# Altium PCB DaughterBoards.PcbDoc (part 1 of 4)
Units mil, origin at the board's own origin, x right, y up, seen from the top; angles counter-clockwise.
Board outline 8080.87 x 6506.06 mil, 4 copper layers (Top Layer, Top, Mid-Layer 1, GND, Mid-Layer 2, VCC, Bottom Layer, Bottom), stack 18.2 mil thick; 508 components, 296 nets, 1635 pads, 376 vias.
Unrouted connection lines stored in the file: 28.
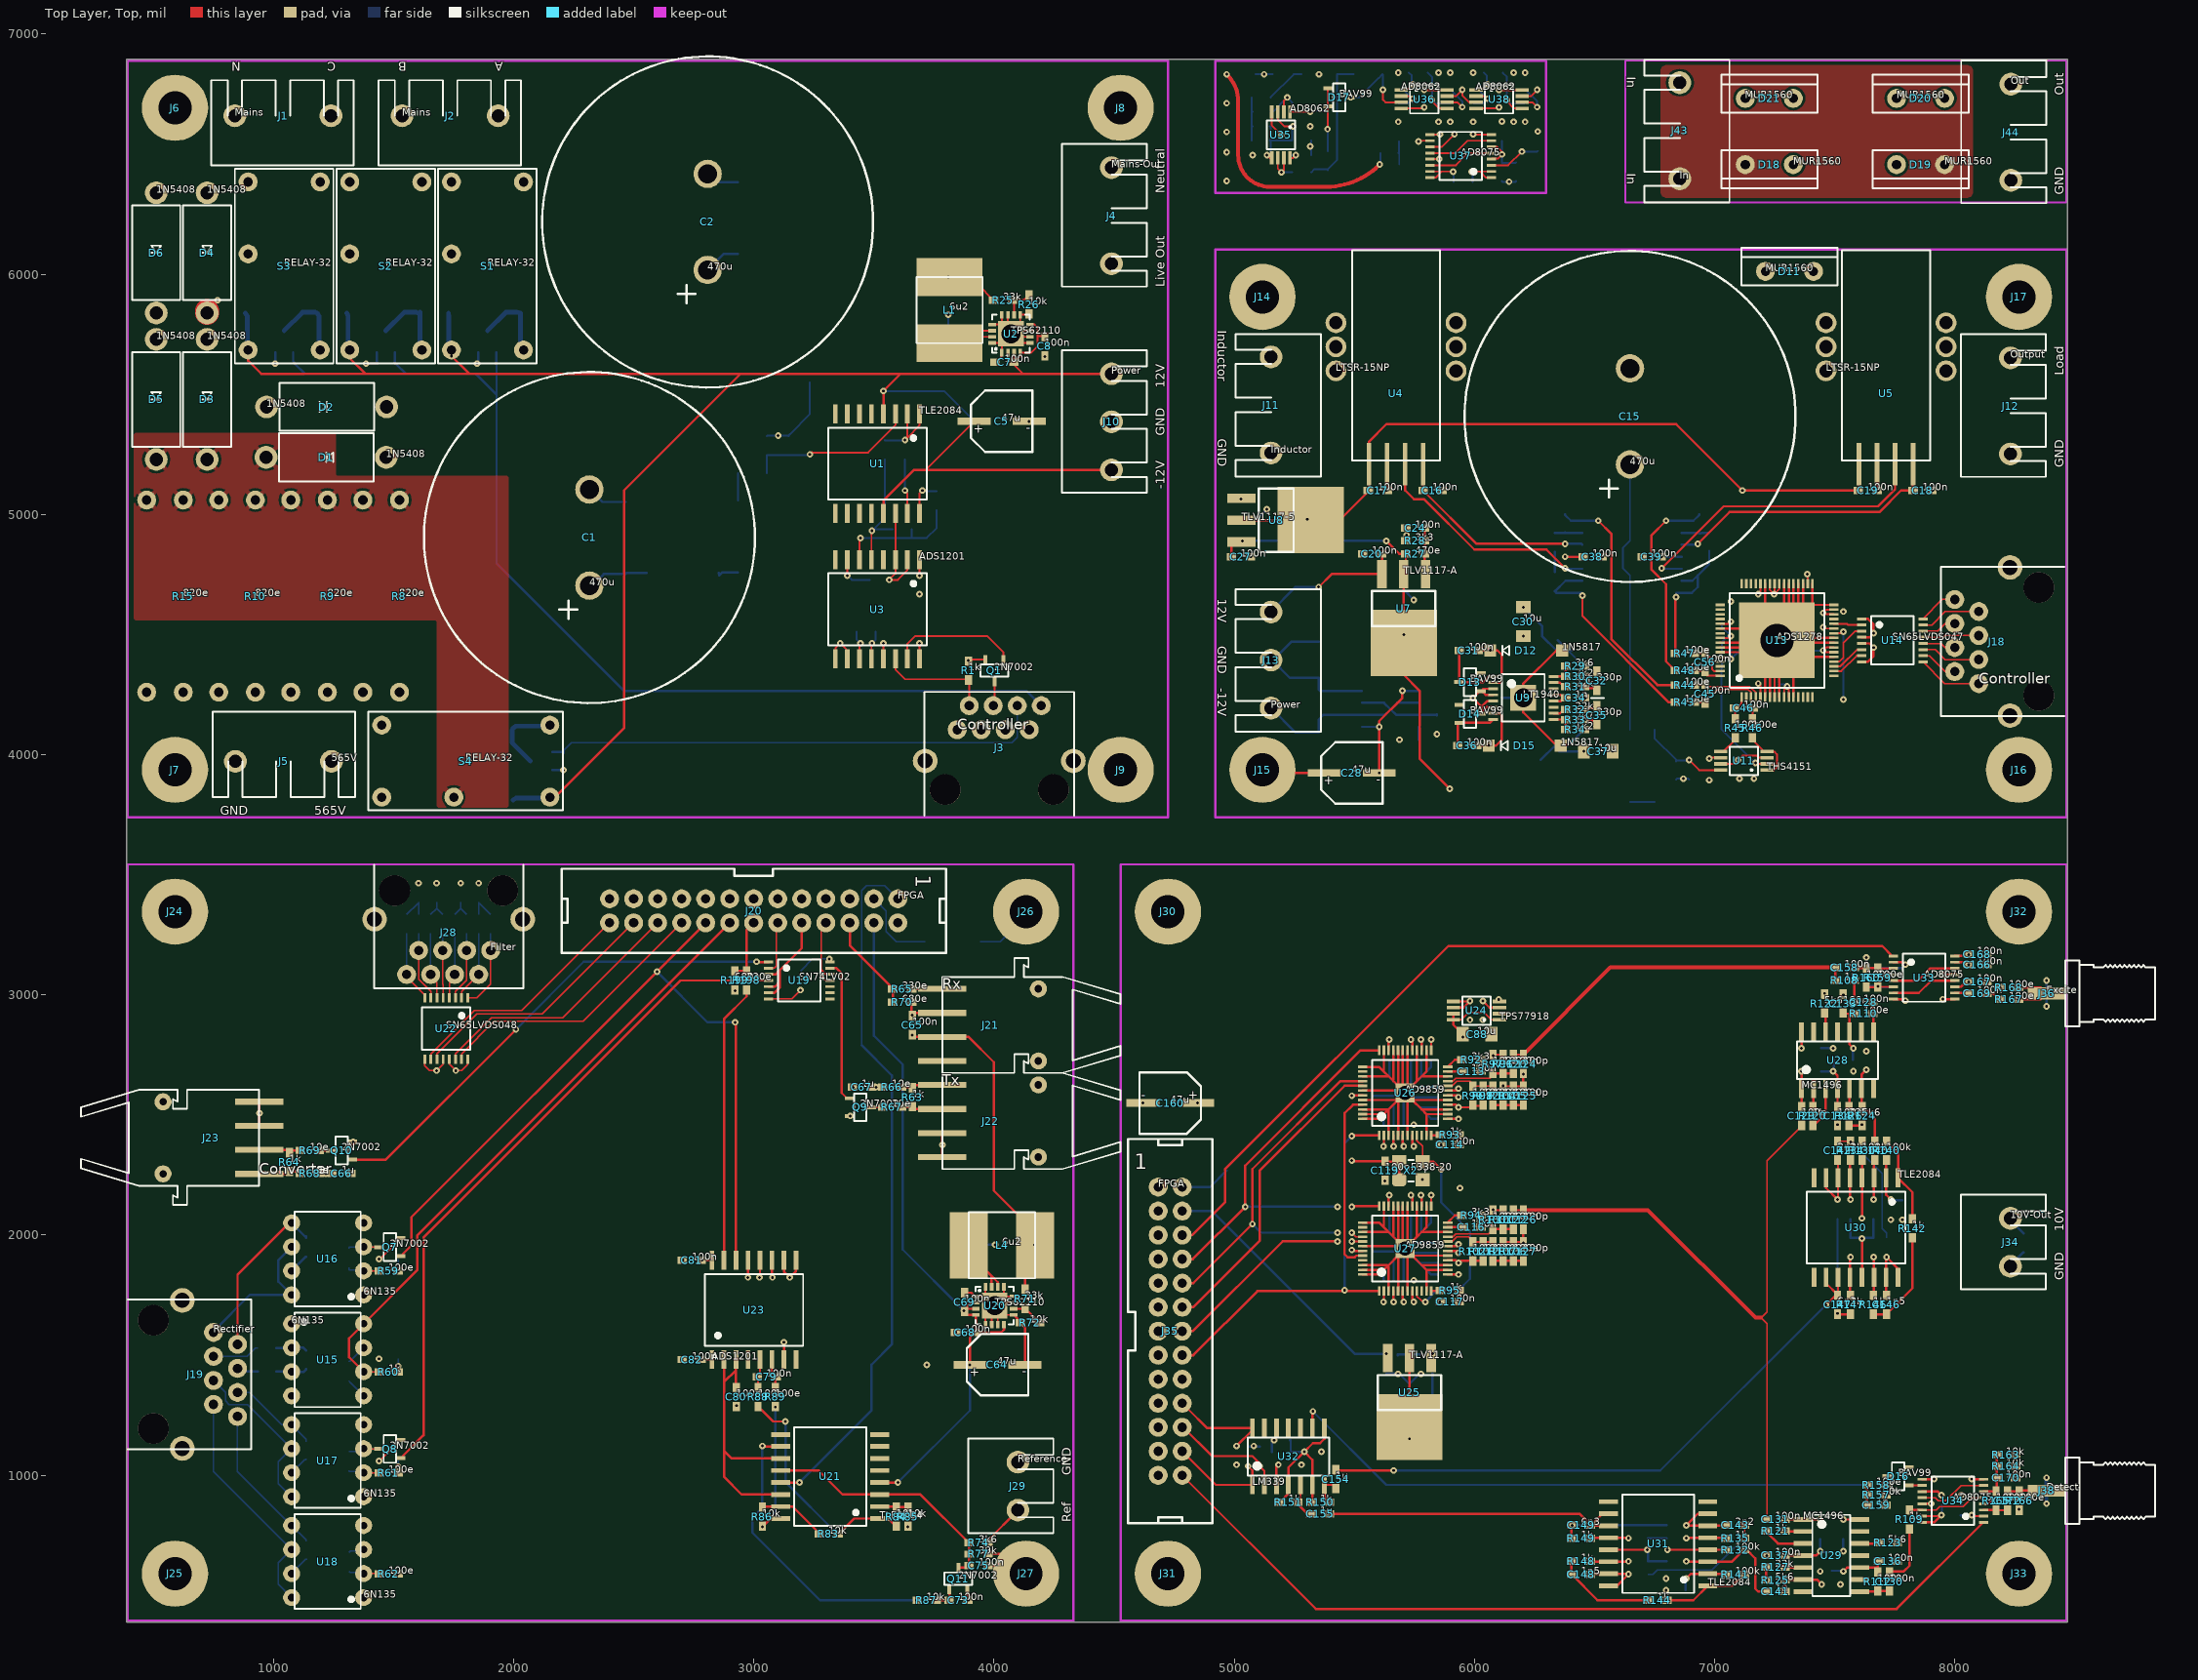
[diagram p0: Top Layer, Top view]
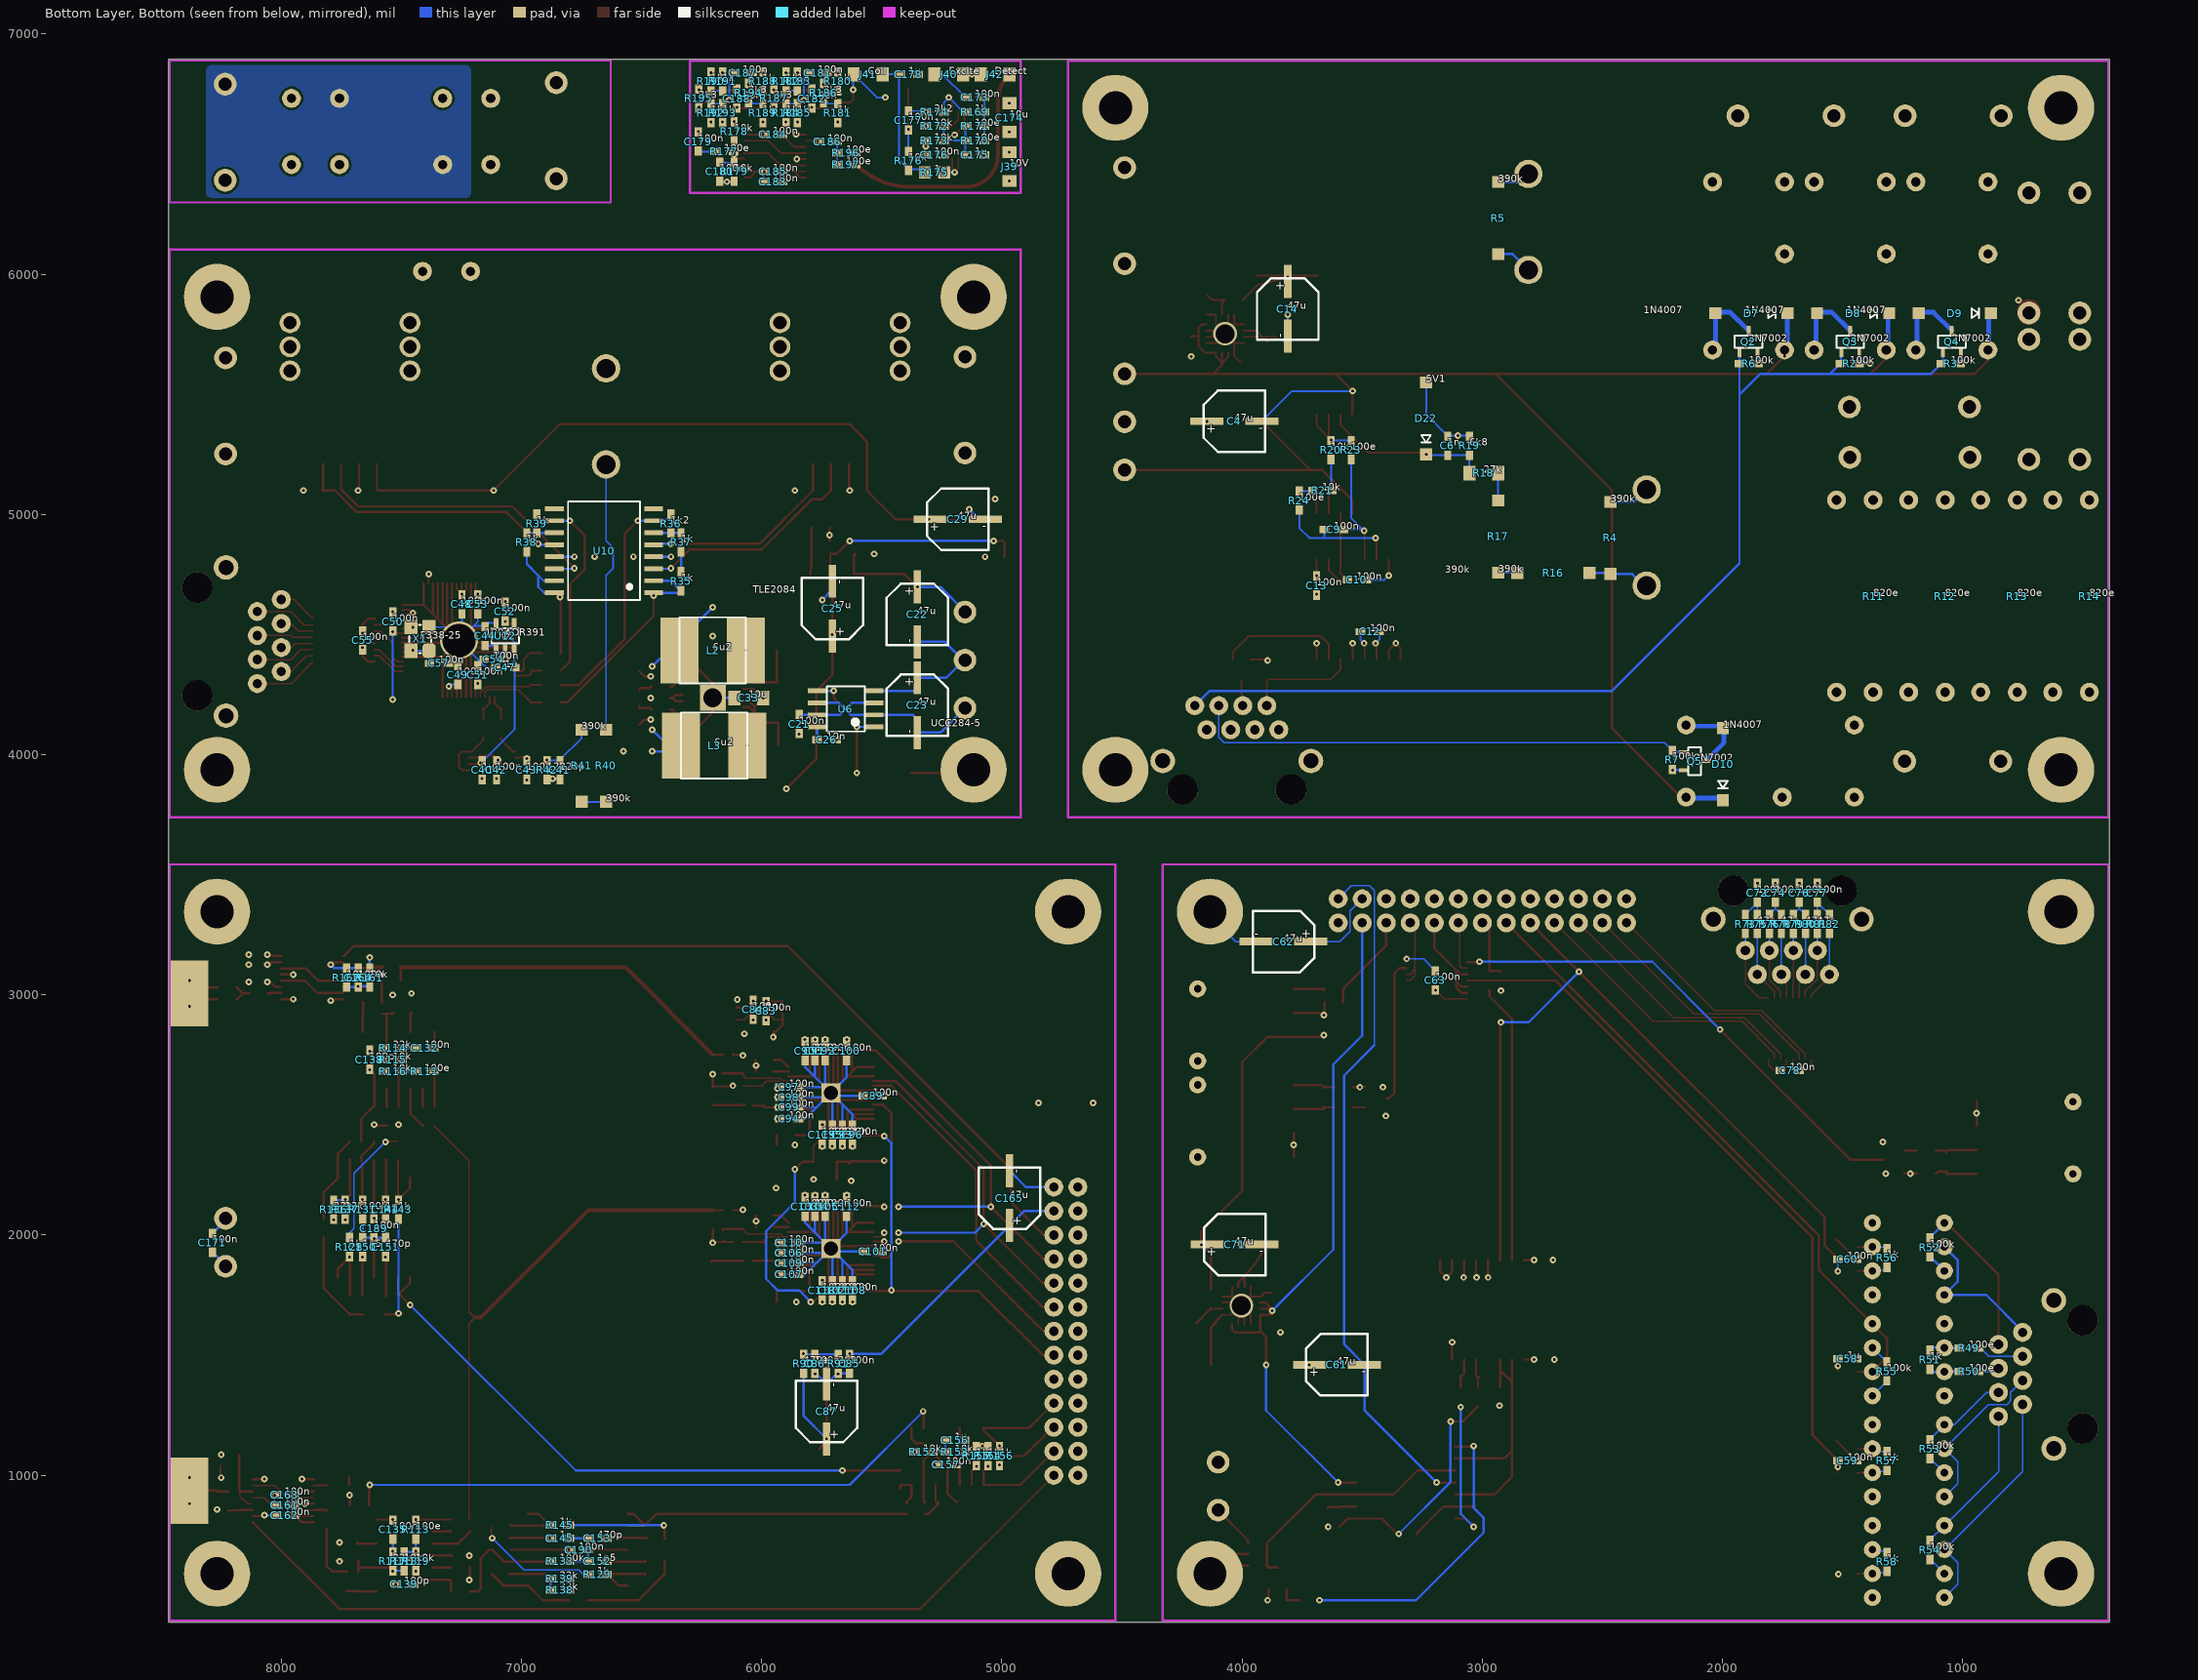
[diagram p1: Bottom Layer, Bottom view, seen from below]
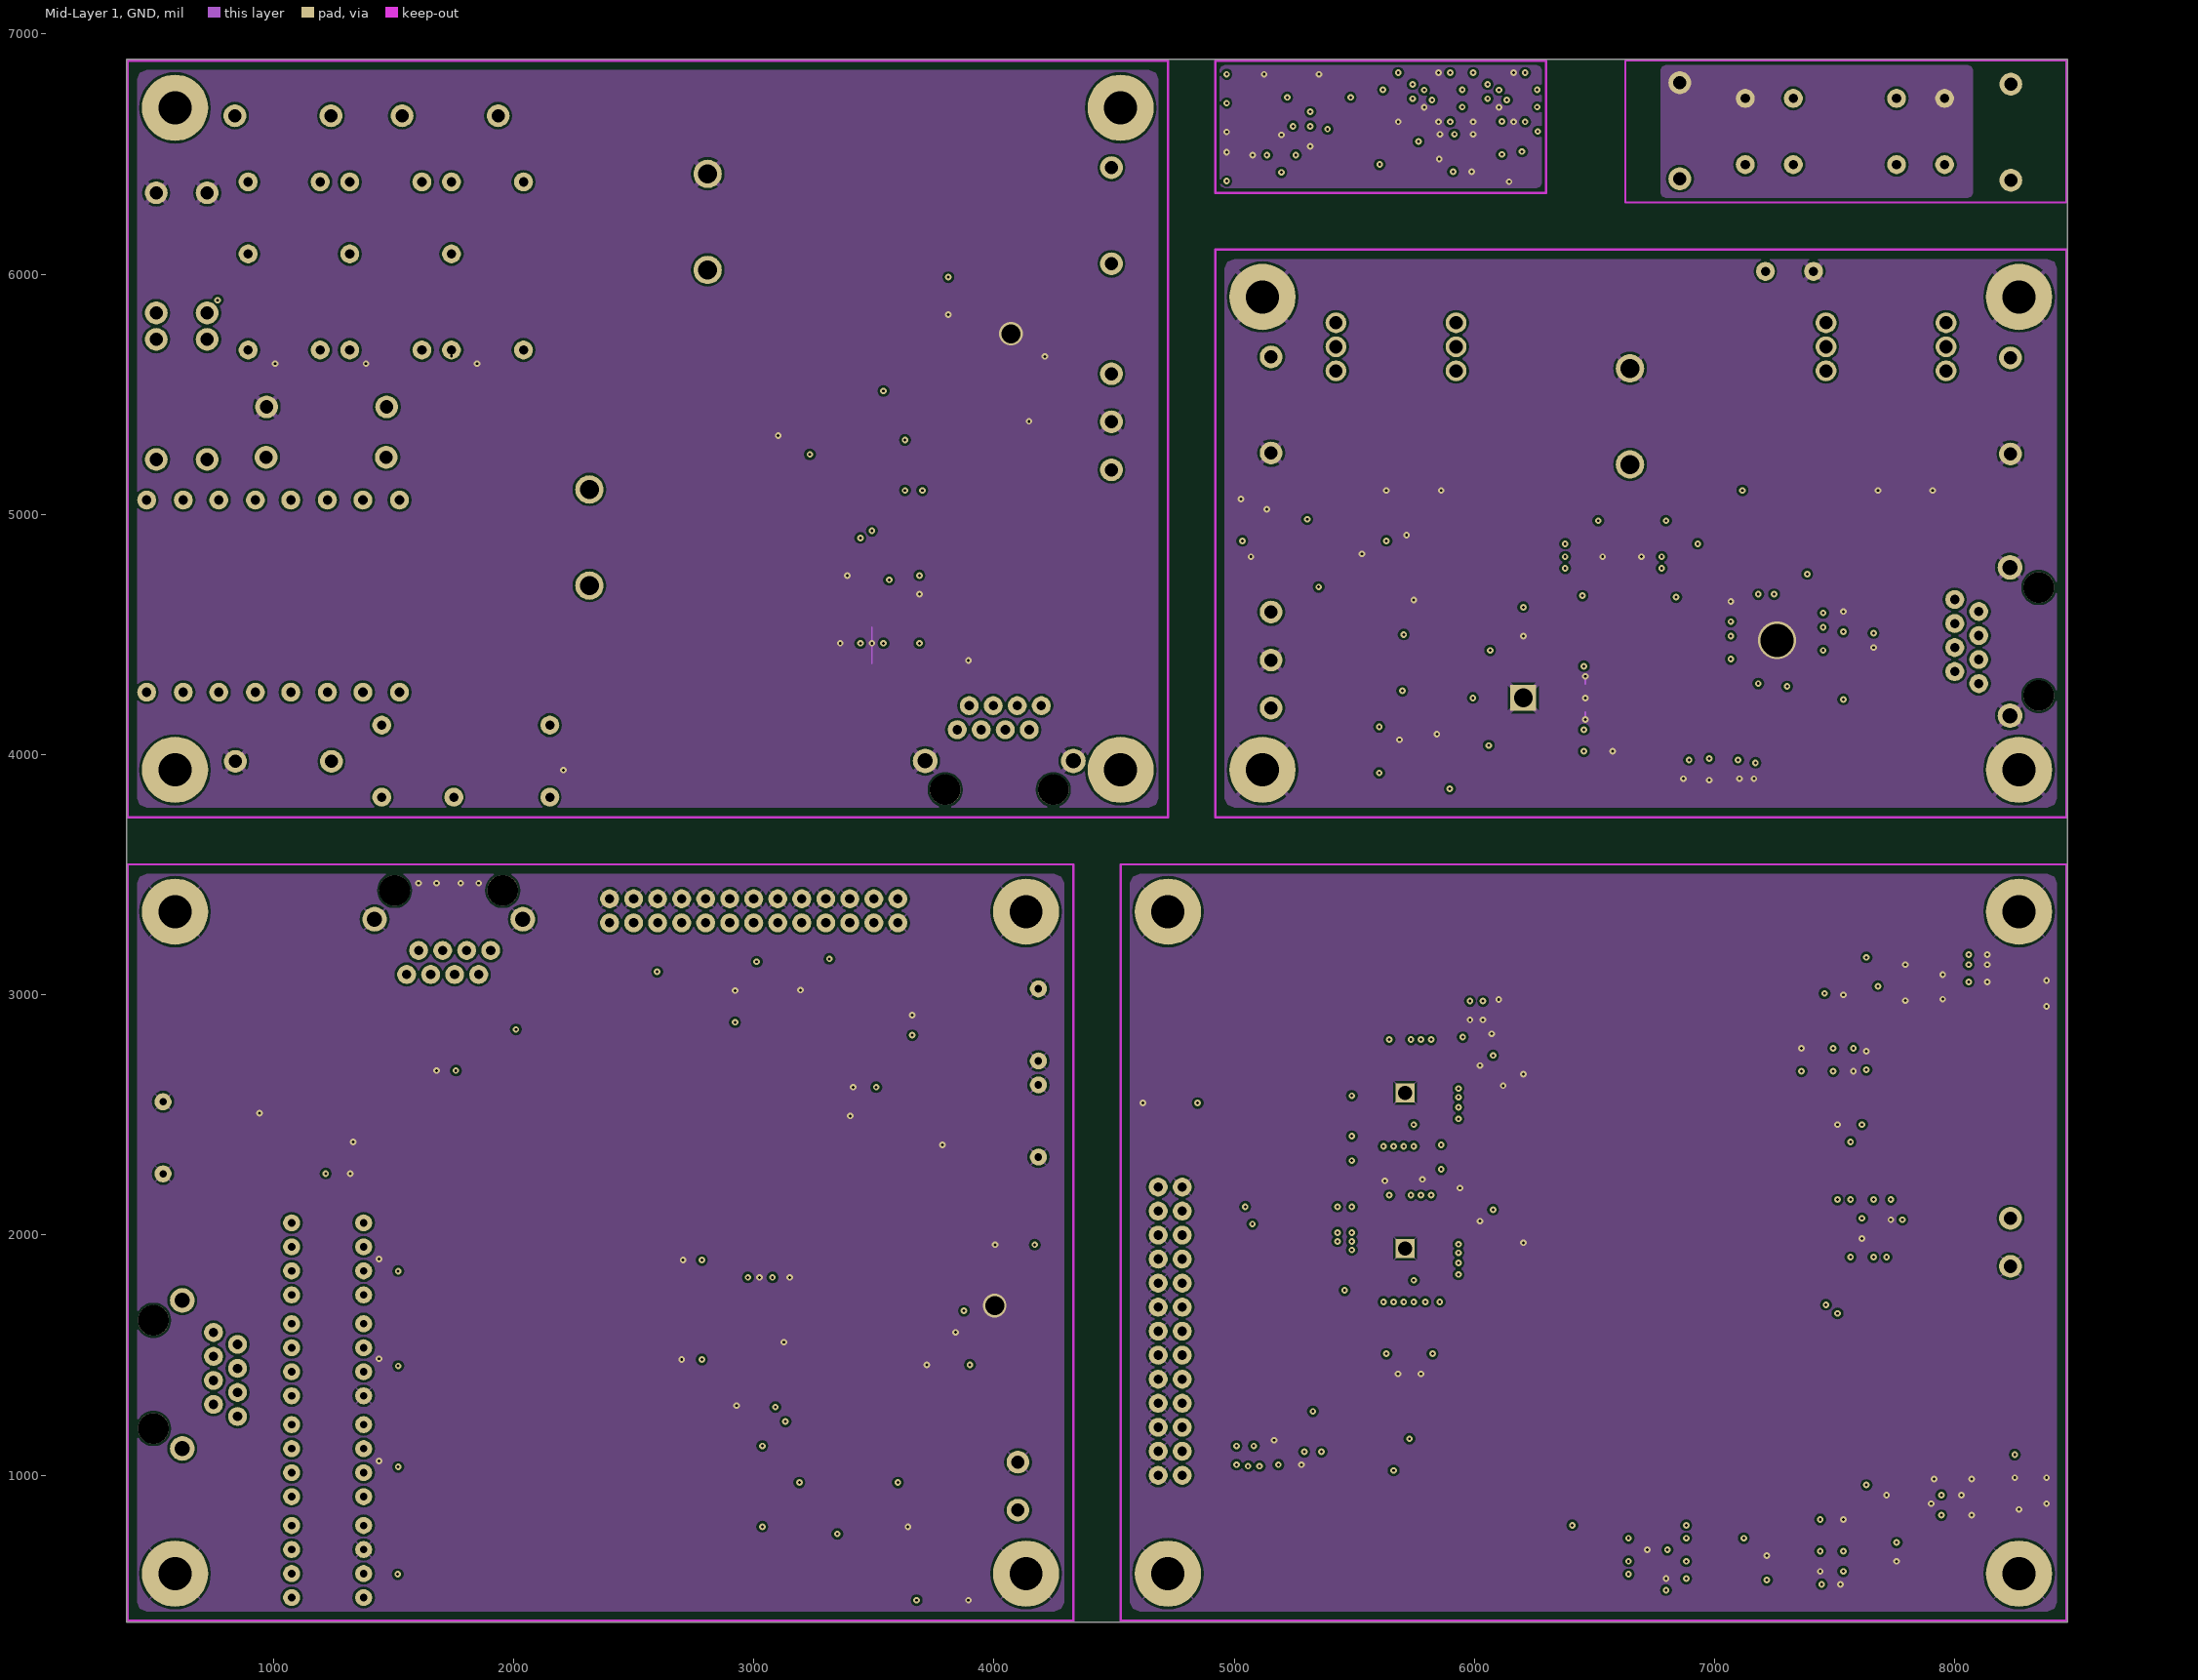
[diagram p2: Mid-Layer 1, GND]
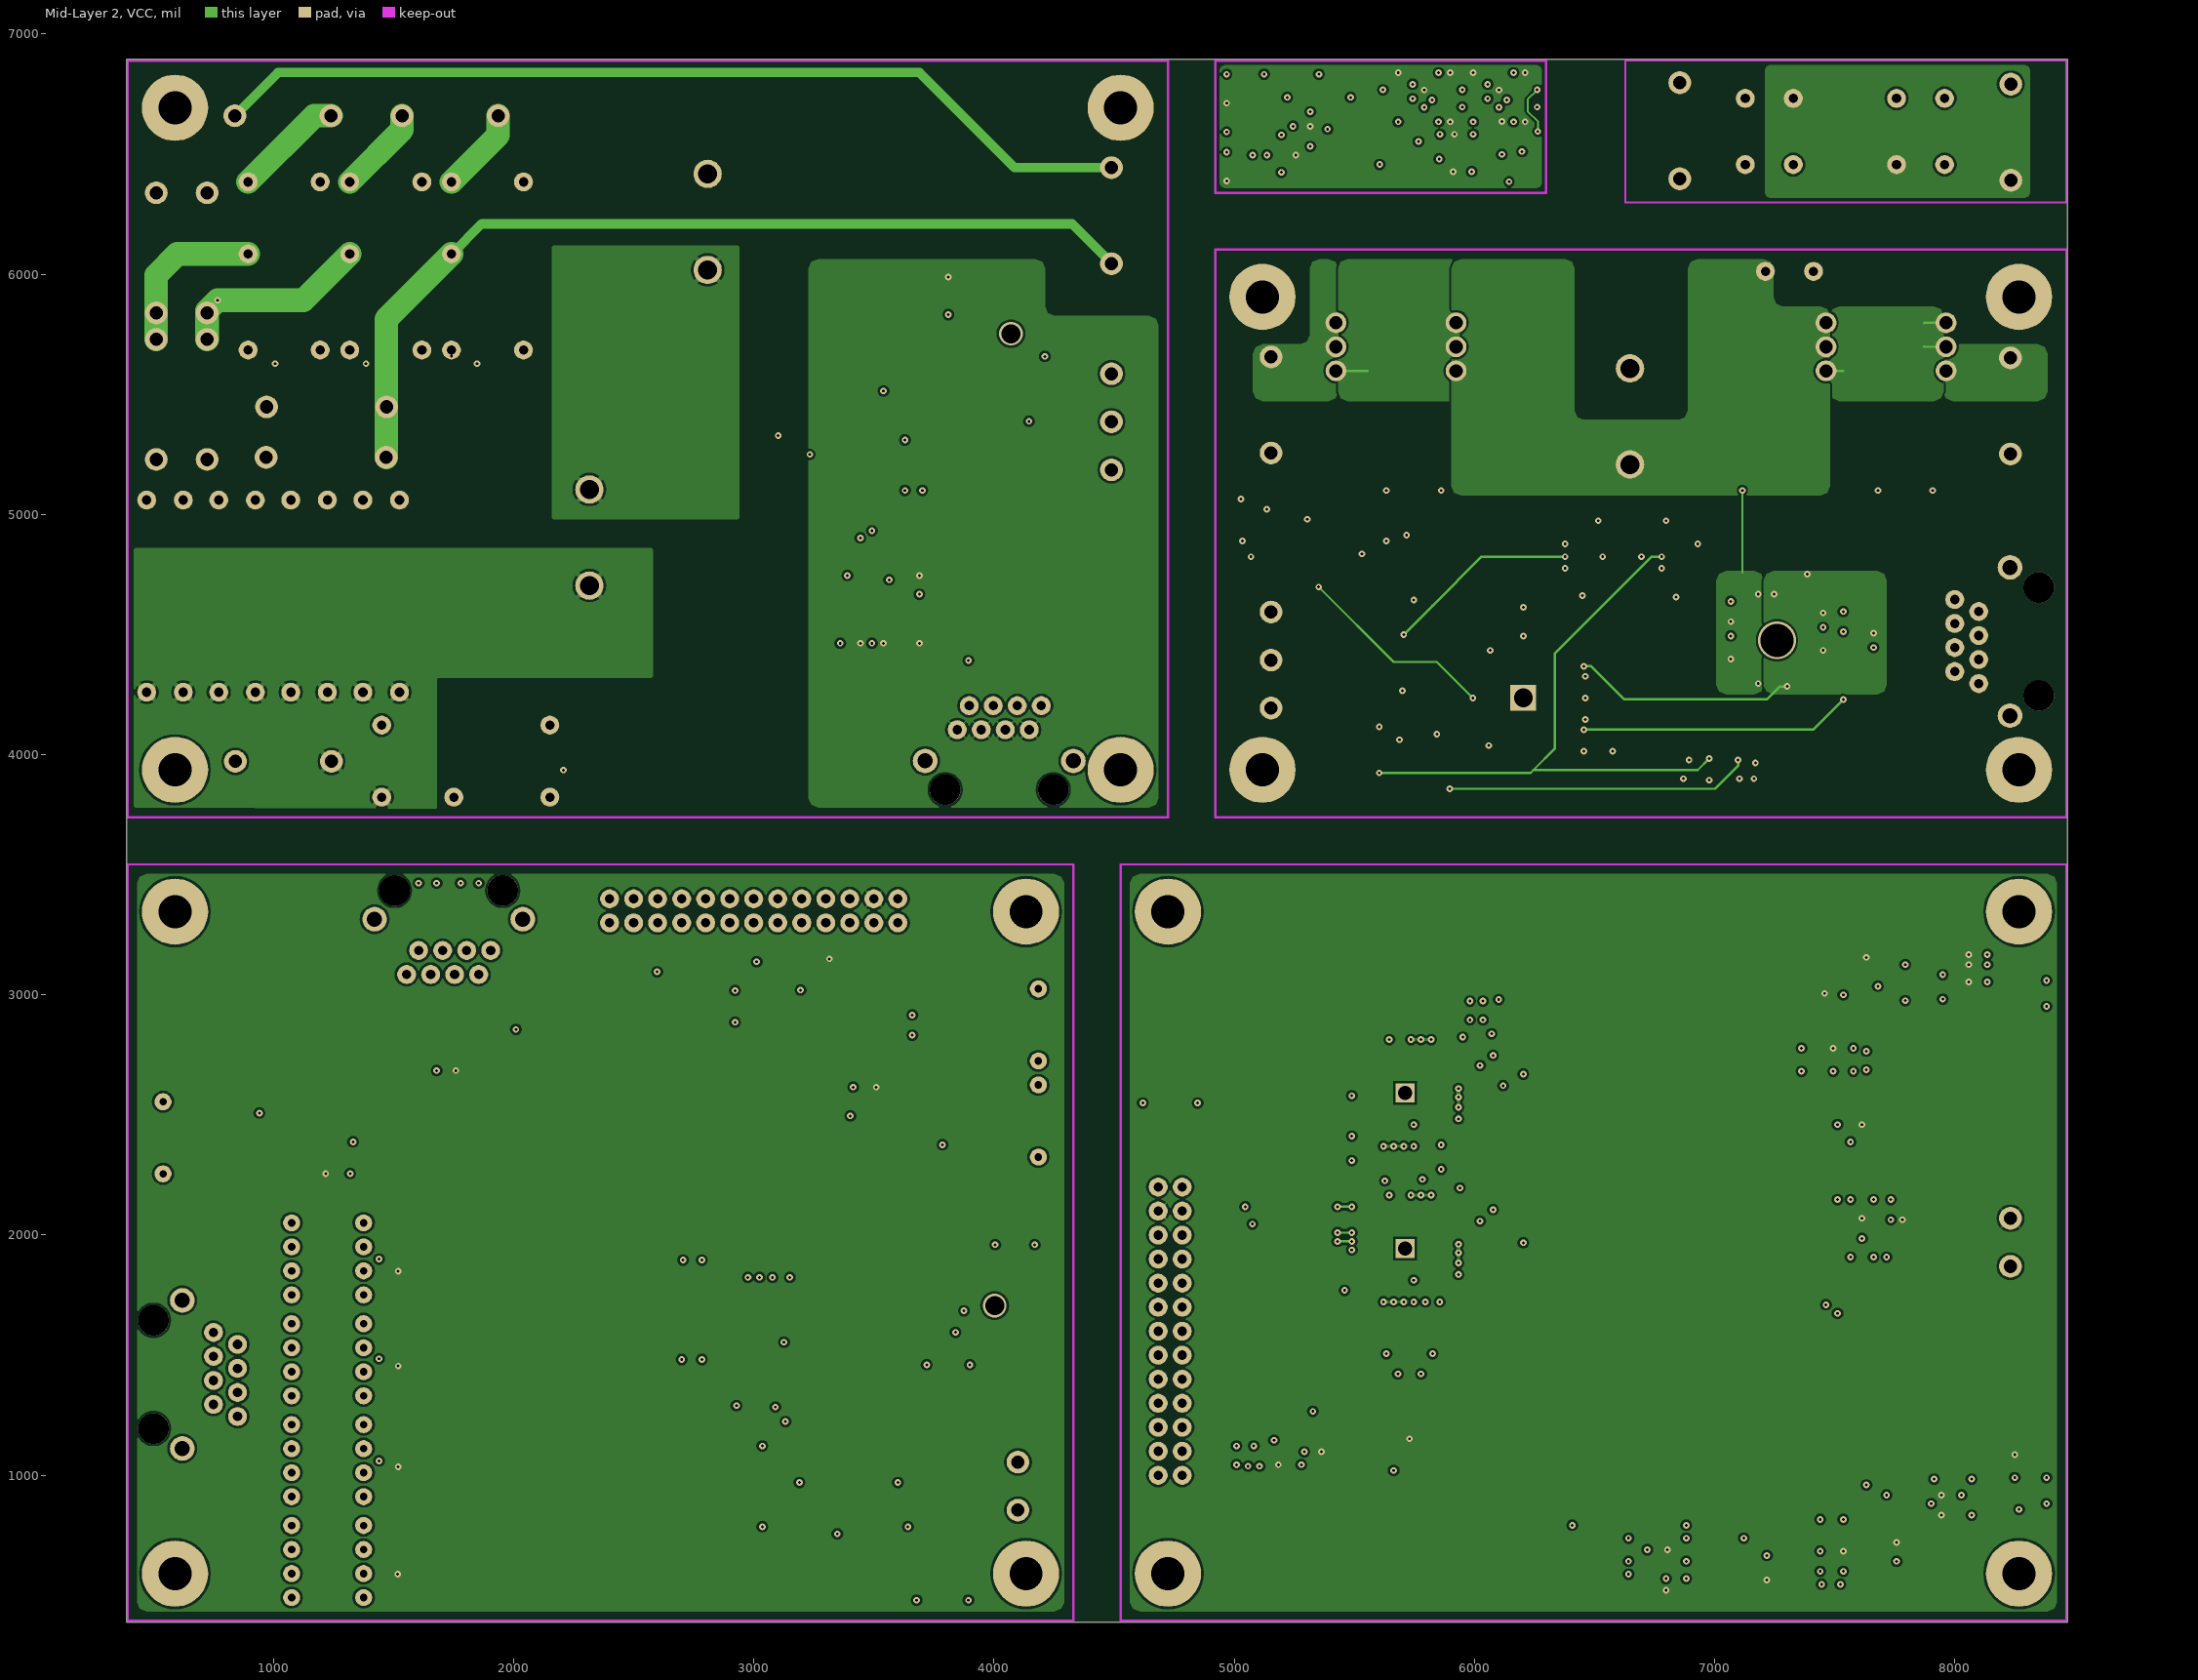
[diagram p3: Mid-Layer 2, VCC]

## Layer stack, top to bottom
Top Solder, Top Mask: solder mask 0.4, Solder Resist, Dk 3.5
Top Layer, Top: signal copper 1.4
Dielectric 1: dielectric 12.6, FR-4, Dk 4.8
Mid-Layer 1, GND: signal copper 1.4
Mid-Layer 2, VCC: signal copper 1.4
Bottom Layer, Bottom: signal copper 1.4
Bottom Solder, Bot Mask: solder mask 0.4, Solder Resist, Dk 3.5

## Board outline
388.7,388.7 8469.57,388.7 8469.57,6894.76 388.7,6894.76

## Design rules (kind name [scope] priority, off if disabled: settings)
Clearance [All] p1: gap=10 ignorepadtopadclearanceinfootprint=FALSE except(0: Arc-Hole Track-Hole SMDPad-Hole THPad-Hole Via-Hole Fill-Hole Poly-Hole Region-Hole Text-Hole; 5.91: Arc-Arc Arc-Track Arc-THPad Arc-Via Track-Track Track-THPad Track-Via THPad-THPad THPad-Via Via-Via)
PlaneClearance [All] p1: clearance=10
PolygonConnect PolygonConnect_52 [IsPolygon And InNet('3_3.3V') And OnLayer('Mid-Layer 2, VCC') vs IsVia] p1: connectstyle=Direct reliefconductorwidth=19.68 reliefentries=4 polygonreliefangle="90 Angle" airgapwidth=10
PolygonConnect PolygonConnect_51 [IsPolygon And InNet('3_3.3V') And OnLayer('Mid-Layer 2, VCC') vs IsPad] p2: connectstyle=Relief reliefconductorwidth=7.87 reliefentries=4 polygonreliefangle="45 Angle" airgapwidth=10
PolygonConnect PolygonConnect_50 [IsPolygon And InNet('4_10V') And OnLayer('Mid-Layer 2, VCC') vs IsVia] p3: connectstyle=Direct reliefconductorwidth=19.68 reliefentries=4 polygonreliefangle="90 Angle" airgapwidth=10
PolygonConnect PolygonConnect_49 [IsPolygon And InNet('4_10V') And OnLayer('Mid-Layer 2, VCC') vs IsPad] p4: connectstyle=Relief reliefconductorwidth=7.87 reliefentries=4 polygonreliefangle="45 Angle" airgapwidth=10
PolygonConnect PolygonConnect_48 [IsPolygon And InNet('4_3.3V') And OnLayer('Mid-Layer 2, VCC') vs IsVia] p5: connectstyle=Direct reliefconductorwidth=19.68 reliefentries=4 polygonreliefangle="90 Angle" airgapwidth=10
PolygonConnect PolygonConnect_47 [IsPolygon And InNet('4_3.3V') And OnLayer('Mid-Layer 2, VCC') vs IsPad] p6: connectstyle=Relief reliefconductorwidth=7.87 reliefentries=4 polygonreliefangle="45 Angle" airgapwidth=10
PolygonConnect PolygonConnect_46 [IsPolygon And InNet('4_1.8V') And OnLayer('Mid-Layer 2, VCC') vs IsVia] p7: connectstyle=Direct reliefconductorwidth=19.68 reliefentries=4 polygonreliefangle="90 Angle" airgapwidth=10
PolygonConnect PolygonConnect_45 [IsPolygon And InNet('4_1.8V') And OnLayer('Mid-Layer 2, VCC') vs IsPad] p8: connectstyle=Relief reliefconductorwidth=7.87 reliefentries=4 polygonreliefangle="45 Angle" airgapwidth=10
PolygonConnect PolygonConnect_44 [IsPolygon And InNet('5_10V') And OnLayer('Mid-Layer 2, VCC') vs IsVia] p9: connectstyle=Direct reliefconductorwidth=19.68 reliefentries=4 polygonreliefangle="90 Angle" airgapwidth=10
PolygonConnect PolygonConnect_43 [IsPolygon And InNet('5_10V') And OnLayer('Mid-Layer 2, VCC') vs IsPad] p10: connectstyle=Relief reliefconductorwidth=7.87 reliefentries=4 polygonreliefangle="45 Angle" airgapwidth=10
PolygonConnect PolygonConnect_42 [IsPolygon And InNet('1_565V') And OnLayer('Mid-Layer 2, VCC') vs IsVia] p11: connectstyle=Direct reliefconductorwidth=19.68 reliefentries=4 polygonreliefangle="90 Angle" airgapwidth=10
PolygonConnect PolygonConnect_41 [IsPolygon And InNet('1_565V') And OnLayer('Mid-Layer 2, VCC') vs IsPad] p12: connectstyle=Relief reliefconductorwidth=19.68 reliefentries=4 polygonreliefangle="45 Angle" airgapwidth=10
PolygonConnect PolygonConnect_40 [IsPolygon And InNet('1_5V') And OnLayer('Mid-Layer 2, VCC') vs IsVia] p13: connectstyle=Direct reliefconductorwidth=19.68 reliefentries=4 polygonreliefangle="90 Angle" airgapwidth=10
PolygonConnect PolygonConnect_39 [IsPolygon And InNet('1_5V') And OnLayer('Mid-Layer 2, VCC') vs IsPad] p14: connectstyle=Relief reliefconductorwidth=7.87 reliefentries=4 polygonreliefangle="45 Angle" airgapwidth=10
PolygonConnect PolygonConnect_38 [IsPolygon And InNet('3_5V') And OnLayer('Mid-Layer 2, VCC') vs IsVia] p15: connectstyle=Direct reliefconductorwidth=19.68 reliefentries=4 polygonreliefangle="90 Angle" airgapwidth=10
PolygonConnect PolygonConnect_37 [IsPolygon And InNet('3_5V') And OnLayer('Mid-Layer 2, VCC') vs IsPad] p16: connectstyle=Relief reliefconductorwidth=7.87 reliefentries=4 polygonreliefangle="45 Angle" airgapwidth=10
PolygonConnect PolygonConnect_36 [IsPolygon And InNet('6_GND') And OnLayer('Mid-Layer 2, VCC') vs IsVia] p17: connectstyle=Direct reliefconductorwidth=19.68 reliefentries=4 polygonreliefangle="90 Angle" airgapwidth=10
PolygonConnect PolygonConnect_35 [IsPolygon And InNet('6_GND') And OnLayer('Mid-Layer 2, VCC') vs IsPad] p18: connectstyle=Direct reliefconductorwidth=19.68 reliefentries=4 polygonreliefangle="90 Angle" airgapwidth=10
PolygonConnect PolygonConnect_34 [IsPolygon And InNet('2_V1') And OnLayer('Mid-Layer 2, VCC') vs IsVia] p19: connectstyle=Direct reliefconductorwidth=19.68 reliefentries=4 polygonreliefangle="90 Angle" airgapwidth=10
PolygonConnect PolygonConnect_33 [IsPolygon And InNet('2_V1') And OnLayer('Mid-Layer 2, VCC') vs IsPad] p20: connectstyle=Direct reliefconductorwidth=7.87 reliefentries=4 polygonreliefangle="90 Angle" airgapwidth=10
PolygonConnect PolygonConnect_32 [IsPolygon And InNet('2_3.3V') And OnLayer('Mid-Layer 2, VCC') vs IsVia] p21: connectstyle=Direct reliefconductorwidth=19.68 reliefentries=4 polygonreliefangle="90 Angle" airgapwidth=10
PolygonConnect PolygonConnect_31 [IsPolygon And InNet('2_3.3V') And OnLayer('Mid-Layer 2, VCC') vs IsPad] p22: connectstyle=Relief reliefconductorwidth=7.87 reliefentries=4 polygonreliefangle="45 Angle" airgapwidth=10
PolygonConnect PolygonConnect_30 [IsPolygon And InNet('NET00045') And OnLayer('Mid-Layer 2, VCC') vs IsVia] p23: connectstyle=Direct reliefconductorwidth=19.68 reliefentries=4 polygonreliefangle="90 Angle" airgapwidth=10
PolygonConnect PolygonConnect_29 [IsPolygon And InNet('NET00045') And OnLayer('Mid-Layer 2, VCC') vs IsPad] p24: connectstyle=Relief reliefconductorwidth=19.68 reliefentries=4 polygonreliefangle="45 Angle" airgapwidth=10
PolygonConnect PolygonConnect_28 [IsPolygon And InNet('NET00019') And OnLayer('Mid-Layer 2, VCC') vs IsVia] p25: connectstyle=Direct reliefconductorwidth=19.68 reliefentries=4 polygonreliefangle="90 Angle" airgapwidth=10
PolygonConnect PolygonConnect_27 [IsPolygon And InNet('NET00019') And OnLayer('Mid-Layer 2, VCC') vs IsPad] p26: connectstyle=Direct reliefconductorwidth=7.87 reliefentries=4 polygonreliefangle="90 Angle" airgapwidth=10
PolygonConnect PolygonConnect_26 [IsPolygon And InNet('NET00051') And OnLayer('Mid-Layer 2, VCC') vs IsVia] p27: connectstyle=Direct reliefconductorwidth=19.68 reliefentries=4 polygonreliefangle="90 Angle" airgapwidth=10
PolygonConnect PolygonConnect_25 [IsPolygon And InNet('NET00051') And OnLayer('Mid-Layer 2, VCC') vs IsPad] p28: connectstyle=Direct reliefconductorwidth=7.87 reliefentries=4 polygonreliefangle="90 Angle" airgapwidth=10
PolygonConnect PolygonConnect_24 [IsPolygon And InNet('2_5V') And OnLayer('Mid-Layer 2, VCC') vs IsVia] p29: connectstyle=Direct reliefconductorwidth=19.68 reliefentries=4 polygonreliefangle="90 Angle" airgapwidth=10
PolygonConnect PolygonConnect_23 [IsPolygon And InNet('2_5V') And OnLayer('Mid-Layer 2, VCC') vs IsPad] p30: connectstyle=Relief reliefconductorwidth=7.87 reliefentries=4 polygonreliefangle="45 Angle" airgapwidth=10
PolygonConnect PolygonConnect_22 [IsPolygon And InNet('NET00243') And OnLayer('Mid-Layer 2, VCC') vs IsVia] p31: connectstyle=Direct reliefconductorwidth=19.68 reliefentries=4 polygonreliefangle="90 Angle" airgapwidth=10
PolygonConnect PolygonConnect_21 [IsPolygon And InNet('NET00243') And OnLayer('Mid-Layer 2, VCC') vs IsPad] p32: connectstyle=Direct reliefconductorwidth=7.87 reliefentries=4 polygonreliefangle="90 Angle" airgapwidth=10
PolygonConnect PolygonConnect_20 [IsPolygon And InNet('NET00002') And OnLayer('Mid-Layer 2, VCC') vs IsVia] p33: connectstyle=Direct reliefconductorwidth=19.68 reliefentries=4 polygonreliefangle="90 Angle" airgapwidth=10
PolygonConnect PolygonConnect_19 [IsPolygon And InNet('NET00002') And OnLayer('Mid-Layer 2, VCC') vs IsPad] p34: connectstyle=Direct reliefconductorwidth=7.87 reliefentries=4 polygonreliefangle="90 Angle" airgapwidth=10
PolygonConnect PolygonConnect_18 [IsPolygon And InNet('3_GND') And OnLayer('Mid-Layer 1, GND') vs IsVia] p35: connectstyle=Direct reliefconductorwidth=19.68 reliefentries=4 polygonreliefangle="90 Angle" airgapwidth=10
PolygonConnect PolygonConnect_17 [IsPolygon And InNet('3_GND') And OnLayer('Mid-Layer 1, GND') vs IsPad] p36: connectstyle=Relief reliefconductorwidth=7.87 reliefentries=4 polygonreliefangle="45 Angle" airgapwidth=10
PolygonConnect PolygonConnect_16 [IsPolygon And InNet('1_GND') And OnLayer('Mid-Layer 1, GND') vs IsVia] p37: connectstyle=Direct reliefconductorwidth=19.68 reliefentries=4 polygonreliefangle="90 Angle" airgapwidth=10
PolygonConnect PolygonConnect_15 [IsPolygon And InNet('1_GND') And OnLayer('Mid-Layer 1, GND') vs IsPad] p38: connectstyle=Relief reliefconductorwidth=19.68 reliefentries=4 polygonreliefangle="45 Angle" airgapwidth=10
PolygonConnect PolygonConnect_14 [IsPolygon And InNet('4_GND') And OnLayer('Mid-Layer 1, GND') vs IsVia] p39: connectstyle=Direct reliefconductorwidth=19.68 reliefentries=4 polygonreliefangle="90 Angle" airgapwidth=10
PolygonConnect PolygonConnect_13 [IsPolygon And InNet('4_GND') And OnLayer('Mid-Layer 1, GND') vs IsPad] p40: connectstyle=Relief reliefconductorwidth=7.87 reliefentries=4 polygonreliefangle="45 Angle" airgapwidth=10
PolygonConnect PolygonConnect_12 [IsPolygon And InNet('2_GND') And OnLayer('Mid-Layer 1, GND') vs IsVia] p41: connectstyle=Direct reliefconductorwidth=19.68 reliefentries=4 polygonreliefangle="90 Angle" airgapwidth=10
PolygonConnect PolygonConnect_11 [IsPolygon And InNet('2_GND') And OnLayer('Mid-Layer 1, GND') vs IsPad] p42: connectstyle=Relief reliefconductorwidth=19.68 reliefentries=4 polygonreliefangle="45 Angle" airgapwidth=10
PolygonConnect PolygonConnect_10 [IsPolygon And InNet('5_GND') And OnLayer('Mid-Layer 1, GND') vs IsVia] p43: connectstyle=Direct reliefconductorwidth=19.68 reliefentries=4 polygonreliefangle="90 Angle" airgapwidth=10
PolygonConnect PolygonConnect_9 [IsPolygon And InNet('5_GND') And OnLayer('Mid-Layer 1, GND') vs IsPad] p44: connectstyle=Relief reliefconductorwidth=7.87 reliefentries=4 polygonreliefangle="45 Angle" airgapwidth=10
PolygonConnect PolygonConnect_8 [IsPolygon And InNet('6_IN2') And OnLayer('Mid-Layer 1, GND') vs IsVia] p45: connectstyle=Direct reliefconductorwidth=19.68 reliefentries=4 polygonreliefangle="90 Angle" airgapwidth=10
PolygonConnect PolygonConnect_7 [IsPolygon And InNet('6_IN2') And OnLayer('Mid-Layer 1, GND') vs IsPad] p46: connectstyle=Direct reliefconductorwidth=19.68 reliefentries=4 polygonreliefangle="90 Angle" airgapwidth=10
PolygonConnect PolygonConnect_6 [IsPolygon And InNet('6_OUT') And OnLayer('Bottom Layer, Bottom') vs IsVia] p47: connectstyle=Direct reliefconductorwidth=19.68 reliefentries=4 polygonreliefangle="90 Angle" airgapwidth=10
PolygonConnect PolygonConnect_5 [IsPolygon And InNet('6_OUT') And OnLayer('Bottom Layer, Bottom') vs IsPad] p48: connectstyle=Direct reliefconductorwidth=19.68 reliefentries=4 polygonreliefangle="90 Angle" airgapwidth=10
PolygonConnect PolygonConnect_4 [IsPolygon And InNet('1_RECTIFIED') And OnLayer('Top Layer, Top') vs IsVia] p49: connectstyle=Direct reliefconductorwidth=19.68 reliefentries=4 polygonreliefangle="90 Angle" airgapwidth=10
PolygonConnect PolygonConnect_3 [IsPolygon And InNet('1_RECTIFIED') And OnLayer('Top Layer, Top') vs IsPad] p50: connectstyle=Relief reliefconductorwidth=19.68 reliefentries=4 polygonreliefangle="45 Angle" airgapwidth=10
PolygonConnect PolygonConnect_2 [IsPolygon And InNet('6_IN1') And OnLayer('Top Layer, Top') vs IsVia] p51: connectstyle=Direct reliefconductorwidth=19.68 reliefentries=4 polygonreliefangle="90 Angle" airgapwidth=10
PolygonConnect PolygonConnect_1 [IsPolygon And InNet('6_IN1') And OnLayer('Top Layer, Top') vs IsPad] p52: connectstyle=Direct reliefconductorwidth=19.68 reliefentries=4 polygonreliefangle="90 Angle" airgapwidth=10
PolygonConnect [All] p53: connectstyle=Relief reliefconductorwidth=10 reliefentries=4 polygonreliefangle="90 Angle" airgapwidth=10
RoutingVias [All] p1: holewidth=28 width=50 viastyle="Through Hole" minholewidth=28 minwidth=50 maxholewidth=28 maxwidth=50
SolderMaskExpansion [All] p1: expansion=4
Width [All] p1: maxlimit=10 minlimit=10 preferedwidth=10
29 further rules are at their usual default settings.

## Components (designator, comment, footprint, x,y, rotation, side; value= is the part's Value field where it differs from the comment)
C1 "470u" C-35MM 2316,4704 r90 top
C2 "470u" C-35MM 2808,6018 r90 top
C4 "47u" C-SMT 4032,5388 r180 bottom
C5 "47u" C-SMT 4032,5388 r0 top
C6 "1n" 0603 3144,5286 r90 bottom
C7 "100n" 0603 4044,5634 r0 top
C8 "100n" 0603 4212,5700 r90 top
C9 "100n" 0603 3618,4938 r0 bottom
C10 "100n" 0603 3522,4728 r180 bottom
C12 "100n" 0603 3468,4512 r180 bottom
C13 "100n" 0603 3690,4704 r90 bottom
C14 "47u" C-SMT 3810,5856 r270 bottom
C15 "470u" C-35MM 6648,5208 r90 top
C16 "100n" 0603 5826,5100 r0 top
C17 "100n" 0603 5598,5100 r0 top
C18 "100n" 0603 7866,5100 r0 top
C19 "100n" 0603 7638,5100 r0 top
C20 "100n" 0603 5574,4836 r0 top
C21 "100n" 0603 5844,4128 r90 bottom
C22 "47u" C-SMT 5352,4584 r270 bottom
C23 "47u" C-SMT 5352,4206 r270 bottom
C24 "100n" 0603 5754,4944 r0 top
C25 "47u" C-SMT 5706,4608 r90 bottom
C26 "10n" 0603 5730,4062 r180 bottom
C27 "100n" 0603 5028,4824 r0 top
C28 "47u" C-SMT 5490,3924 r0 top
C29 "47u" C-SMT 5184,4980 r180 bottom
C30 "10u" 1206 6204,4554 r270 top
C31 "100n" 0603 5976,4434 r180 top
C32 "330p" 0603 6510,4308 r90 top
C33 "10u" 1206 6054,4236 r0 bottom
C34 "1n" 0603 6420,4236 r0 top
C35 "330p" 0603 6510,4164 r270 top
C36 "100n" 0603 5970,4038 r0 top
C37 "10u" 1206 6516,4014 r0 top
C38 "100n" 0603 6492,4824 r0 top
C39 "100n" 0603 6738,4824 r180 top
C40 "1u" 0603 7164,3936 r90 bottom
C41 "220p" 0603 6840,3936 r90 bottom
C42 "100n" 0603 7104,3936 r270 bottom
C43 "100n" 0603 6978,3936 r270 bottom
C44 "100n" 0603 7152,4494 r270 bottom
C45 "100n" 0603 6960,4254 r90 top
C46 "100n" 0603 7122,4194 r0 top
C47 "1u" 0603 7068,4362 r180 bottom
C48 "100n" 0603 7248,4626 r90 bottom
C49 "100n" 0603 7266,4332 r270 bottom
C50 "100n" 0603 7536,4554 r270 bottom
C51 "100n" 0603 7182,4332 r270 bottom
C52 "100n" 0603 7068,4596 r270 bottom
C53 "100n" 0603 7182,4626 r90 bottom
C54 "100n" 0603 7116,4398 r180 bottom
C55 "100n" 0603 7662,4476 r90 bottom
C56 "100n" 0603 6960,4386 r270 top
C57 "100n" 0603 7344,4380 r0 bottom
C58 "1u" 0603 1480,1485 r180 bottom
C59 "100n" 0603 1480,1060 r180 bottom
C60 "100n" 0603 1480,1900 r180 bottom
C61 "47u" C-SMT 3605,1460 r180 bottom
C62 "47u" C-SMT 3828,3222 r0 bottom
C63 "100n" 0603 3195,3060 r270 bottom
C64 "47u" C-SMT 4015,1460 r0 top
C65 "100n" 0603 3660,2874 r90 top
C66 "1u" 0603 1284,2256 r0 top
C67 "1u" 0603 3450,2616 r180 top
C68 "100n" 0603 3880,1595 r0 top
C69 "100n" 0603 3878,1721 r270 top
C71 "47u" C-SMT 4031,1961 r180 bottom
C72 "100n" 0603 1855,3425 r90 bottom
C73 "100n" 0603 3852,480 r0 top
C74 "100n" 0603 1780,3425 r90 bottom
C75 "100n" 0603 3936,624 r0 top
C76 "100n" 0603 1680,3425 r90 bottom
C77 "100n" 0603 1605,3425 r90 bottom
C78 "100n" 0603 1720,2685 r180 bottom
C79 "100n" 0603 3054,1410 r0 top
C80 "100n" 0603 2928,1326 r270 top
C81 "100n" 0603 2742,1896 r0 top
C82 "100n" 0603 2742,1482 r0 top
C83 "100n" 0603 5981.72,2932.17 r90 bottom
C84 "100n" 0603 6035.72,2938.17 r90 bottom
C85 "100n" 0603 5634,1464 r90 bottom
C86 "100n" 0603 5778,1464 r90 bottom
C87 "47u" C-SMT 5730,1266 r90 bottom
C88 "10u" 1206 6011.72,2836.17 r180 top
C89 "100n" 0603 5538,2580 r180 bottom
C90 "100n" 0603 5820,2766 r90 bottom
C91 "100n" 0603 5778,2766 r90 bottom
C92 "100n" 0603 5736,2766 r90 bottom
C93 "100n" 0603 5664,2418 r270 bottom
C94 "100n" 0603 5886,2484 r0 bottom
C95 "100n" 0603 5706,2418 r270 bottom
C96 "100n" 0603 5622,2418 r270 bottom
C97 "100n" 0603 5886,2616 r0 bottom
C98 "100n" 0603 5886,2574 r0 bottom
C99 "100n" 0603 5886,2532 r0 bottom
C100 "100n" 0603 5646,2766 r90 bottom
C101 "100n" 0603 5538,1932 r180 bottom
C102 "100n" 0603 5706,1770 r270 bottom
C103 "100n" 0603 5820,2118 r90 bottom
C104 "100n" 0603 5778,2118 r90 bottom
C105 "100n" 0603 5736,2118 r90 bottom
C106 "100n" 0603 5886,1926 r0 bottom
C107 "100n" 0603 5886,1836 r0 bottom
C108 "100n" 0603 5622,1770 r270 bottom
C109 "100n" 0603 5886,1884 r0 bottom
C110 "100n" 0603 5886,1968 r0 bottom
C111 "100n" 0603 5664,1770 r270 bottom
C112 "100n" 0603 5646,2118 r90 bottom
C113 "100n" 0603 5988,2682 r0 top
C114 "100n" 0603 5898,2376 r180 top
C115 "100n" 0603 5748,2418 r90 bottom
C116 "100n" 0603 5988,2034 r0 top
C117 "100n" 0603 5898,1722 r180 top
C118 "100n" 0603 5748,1770 r90 bottom
C119 "100n" 0603 5628,2268 r90 top
C120 "100n" 0603 6162,2712 r90 top
C121 "100n" 0603 6078,2580 r270 top
C122 "100n" 0603 6162,2064 r90 top
C123 "100n" 0603 6078,1932 r270 top
C124 "100p" 0603 6204,2712 r270 top
C125 "100p" 0603 6204,2580 r90 top
C126 "100p" 0603 6204,2064 r270 top
C127 "100p" 0603 6204,1932 r90 top
C128 "100n" 0603 7620,2970 r0 top
C129 "100n" 0603 7362,2496 r90 top
C130 "100n" 0603 7728,558 r270 top
C131 "100n" 0603 7254,816 r0 top
C132 "100n" 0603 7404,2778 r0 bottom
C133 "100n" 0603 7536,2964 r270 top
C134 "100n" 0603 7512,2496 r90 top
C135 "100n" 0603 7536,774 r270 bottom
C136 "100n" 0603 7722,642 r180 top
C137 "100n" 0603 7254,666 r0 top
C138 "100p" 0603 7632,2730 r270 bottom
C139 "100p" 0603 7488,546 r180 bottom
C140 "1u" 0603 7668,2352 r270 top
C141 "1u" 0603 7254,516 r180 top
C142 "2n2" 0603 7512,2352 r270 top
C143 "2n2" 0603 7086,792 r180 top
C144 "1n" 0603 7566,2106 r90 bottom
C145 "1n" 0603 6840,738 r0 bottom
C146 "1n5" 0603 7716,1710 r90 top
C147 "6n3" 0603 7512,1710 r90 top
C148 "1n5" 0603 6444,588 r0 top
C149 "6n3" 0603 6444,792 r0 top
C150 "1n5" 0603 7662,1950 r270 bottom
C151 "470p" 0603 7566,1950 r270 bottom
C152 "1n5" 0603 6684,642 r180 bottom
C153 "470p" 0603 6684,738 r180 bottom
C154 "1u" 0603 5424,984 r270 top
C155 "1u" 0603 5358,840 r180 top
C156 "1u" 0603 5196,1146 r0 bottom
C157 "100n" 0603 5232,1044 r0 bottom
C158 "100n" 0603 7542,3114 r0 top
C159 "1n" 0603 7674,876 r180 top
C160 "47u" C-SMT 4734,2550 r180 top
C161 "100n" 0603 7986,876 r180 bottom
C162 "100n" 0603 7986,834 r180 bottom
C163 "100n" 0603 7986,918 r180 bottom
C164 "100n" 0603 7680,3072 r270 bottom
C165 "47u" C-SMT 4968,2154 r90 bottom
C166 "100n" 0603 8094,3126 r0 top
C167 "100n" 0603 8094,3054 r0 top
C168 "100n" 0603 8094,3168 r0 top
C169 "100n" 0603 8094,3006 r0 top
C170 "100n" 0603 8214,990 r180 top
C171 "100n" 0603 8286,1968 r90 bottom
C172 "100n" 0603 8220,894 r90 top
C173 "100n" 0603 5112.8,6736.42 r180 bottom
C174 "10u" 1206 4968.7,6652.36 r90 bottom
C175 "1u" 0603 5112.8,6496.26 r0 bottom
C176 "100n" 0603 5280.91,6496.26 r180 bottom
C177 "100n" 0603 5388.98,6640.35 r270 bottom
C178 "1u" 0603 5388.98,6832.48 r0 bottom
C179 "100n" 0603 6264.25,6552.76 r270 bottom
C180 "100n" 0603 6174.49,6427.09 r90 bottom
C181 "100n" 0603 5767.19,6839 r180 bottom
C182 "100n" 0603 5791.2,6730.93 r90 bottom
C183 "100n" 0603 5953.07,6385.2 r0 bottom
C184 "100n" 0603 5953.07,6582.68 r0 bottom
C185 "100n" 0603 5953.07,6427.09 r0 bottom
C186 "100n" 0603 5725.67,6552.76 r180 bottom
C187 "100n" 0603 6079.19,6839 r180 bottom
C188 "100n" 0603 6103.2,6730.93 r90 bottom
C189 "100n" 0603 7614,2028 r90 bottom
C190 "100n" 0603 6762,690 r0 bottom
D1 "1N5408" DO-201 1470,5238 r180 top
D2 "1N5408" DO-201 972,5448 r0 top
D3 "1N5408" DO-201 724.47,5728.94 r270 top
D4 "1N5408" DO-201 724.47,6339.18 r270 top
D5 "1N5408" DO-201 512.46,5728.94 r270 top
D6 "1N5408" DO-201 512.46,6339.18 r270 top
D7 "1N4007" D-THT 2029.4,5837.83 r180 bottom
D8 "1N4007" D-THT 1606.16,5837.83 r180 bottom
D9 "1N4007" D-THT 1182.91,5837.83 r180 bottom
D10 "1N4007" D-THT 1998.17,4110.91 r270 bottom
D11 "MUR1560" TO-220-2-UP 7212,6012 r180 top
D12 "1N5817" D-THT 6366,4434 r180 top
D13 "BAV99" SOT-23 5982,4302 r180 top
D14 "BAV99" SOT-23 5982,4170 r0 top
D15 "1N5817" D-THT 6360,4038 r180 top
D16 "BAV99" SOT-23 7764,996 r180 top
D17 "BAV99" SOT-23 5437.01,6736.42 r0 top
D18 "MUR1560" TO-220-2-UP 7327.89,6456.69 r0 top
D19 "MUR1560" TO-220-2-UP 7957.81,6456.69 r0 top
D20 "MUR1560" TO-220-2-UP 7757.81,6732.28 r180 top
D21 "MUR1560" TO-220-2-UP 7127.89,6732.28 r180 top
D22 "5V1" D-THT 3234,5550 r270 bottom
J1 "Mains" TERMINAL_TERMINAL(Primary) 840,6660 r0 top
J2 "Mains" TERMINAL_TERMINAL(Primary) 1536,6660 r0 top
J3 "Controller" "RJ-45 CAT-5" 3847.15,4104 r0 top
J4 "Mains-Out" TERMINAL_TERMINAL(Primary) 4489.15,6444 r270 top
J5 "565V" TERMINAL_TERMINAL(Primary) 1242,3972 r180 top
J6 "Mount" MOUNT 590.55,6692.91 r0 top
J7 "Mount" MOUNT 590.55,3937.01 r0 top
J8 "Mount" MOUNT 4527.56,6692.91 r0 top
J9 "Mount" MOUNT 4527.56,3937.01 r0 top
J10 "Power" TERM-3_TERM-3(Primary) 4489.15,5586 r270 top
J11 "Inductor" TERMINAL_TERMINAL(Primary) 5154,5256 r90 top
J12 "Output" TERMINAL_TERMINAL(Primary) 8232,5652 r270 top
J13 "Power" TERM-3_TERM-3(Primary) 5154,4194 r90 top
J14 "Mount" MOUNT 5118.11,5905.51 r0 top
J15 "Mount" MOUNT 5118.11,3937.01 r0 top
J16 "Mount" MOUNT 8267.72,3937.01 r0 top
J17 "Mount" MOUNT 8267.72,5905.51 r0 top
J18 "Controller" "RJ-45 CAT-5" 8100,4296 r90 top
J19 "Rectifier" "RJ-45 CAT-5" 750.98,1595 r270 top
J20 "FPGA" HEADER-26 3600,3400 r270 top
J21 "Rx" HFBR 3785,3025 r0 top
J22 "Tx" HFBR 3785,2625 r0 top
J23 "Converter" HFBR 940.98,2255 r180 top
J24 "Mount" MOUNT 590.55,3346.46 r0 top
J25 "Mount" MOUNT 590.55,590.55 r0 top
J26 "Mount" MOUNT 4133.86,3346.46 r0 top
J27 "Mount" MOUNT 4133.86,590.55 r0 top
J28 "Filter" "RJ-45 CAT-5" 1905,3185 r180 top
J29 "Reference" TERM-2_TERM-2(Primary) 4100,1055 r270 top
J30 "Mount" MOUNT 4724.41,3346.46 r0 top
J31 "Mount" MOUNT 4724.41,590.55 r0 top
J32 "Mount" MOUNT 8267.72,3346.46 r0 top
J33 "Mount" MOUNT 8267.72,590.55 r0 top
J34 "10V-Out" TERM-2_TERM-2(Primary) 8232,2070 r270 top
J35 "FPGA" HEADER-26 4683.86,2200 r0 top
J36 "Excite" SMA 8382,3006 r180 top
J38 "Detect" SMA 8382,936 r180 top
J39 "10V" 1206 4968.7,6448.23 r270 bottom
J40 "Excite" 1206 5220.87,6832.48 r0 bottom
J41 "Coil" 1206 5557.09,6832.48 r0 bottom
J42 "Detect" 1206 5028.74,6832.48 r180 bottom
J43 "In" TERMINAL_TERMINAL(Primary) 6855.45,6397.64 r90 top
J44 "Out" TERMINAL_TERMINAL(Primary) 8233.4,6791.34 r270 top
L1 "6u2" 6.2UH 3815.17,5850.88 r90 top
L2 "6u2" 6.2UH 6204,4434 r180 bottom
L3 "6u2" 6.2UH 6198,4038 r0 bottom
L4 "6u2" 6.2UH 4033.33,1957.93 r0 top
Q1 "2N7002" SOT-23 4002,4350 r270 top
Q2 "2N7002" SOT-23 1891.61,5719.72 r90 bottom
Q3 "2N7002" SOT-23 1468.36,5719.72 r90 bottom
Q4 "2N7002" SOT-23 1045.12,5719.72 r90 bottom
Q5 "2N7002" SOT-23 2116.28,3973.12 r180 bottom
Q7 "2N7002" SOT-23 1485,1950 r180 top
Q8 "2N7002" SOT-23 1485,1110 r180 top
Q9 "2N7002" SOT-23 3444,2532 r0 top
Q10 "2N7002" SOT-23 1284,2352 r180 top
Q11 "2N7002" SOT-23 3852,570 r90 top
R1 "1k" 0603 3894,4350 r270 top
R2 "100k" 0603 1470,5628 r0 bottom
R3 "100k" 0603 1050,5628 r0 bottom
R4 "390k" R-THT 2466,5052 r270 bottom
R5 "390k" R-THT 2934,6384 r270 bottom
R6 "100k" 0603 1890,5628 r0 bottom
R7 "100k" 0603 2208,3978 r90 bottom
R8 "820e" R-5W 1525.17,4659.94 r90 top
R9 "820e" R-5W 1225.17,4659.94 r90 top
R10 "820e" R-5W 925.17,4659.94 r90 top
R11 "820e" R-5W 1372.87,4659.93 r90 bottom
R12 "820e" R-5W 1072.85,4659.94 r90 bottom
R13 "820e" R-5W 772.85,4659.94 r90 bottom
R14 "820e" R-5W 472.85,4659.94 r90 bottom
R15 "820e" R-5W 625.17,4659.94 r90 top
R16 "390k" R-THT 2854.43,4757.1 r180 bottom
R17 "390k" R-THT 2934,4758 r90 bottom
R18 "27k" 1206 2994,5172 r180 bottom
R19 "6k8" 0603 3054,5286 r270 bottom
R20 "10k" 0603 3630,5268 r270 bottom
R21 "10k" 0603 3666,5100 r180 bottom
R23 "100e" 0603 3546,5268 r90 bottom
R24 "100e" 0603 3762,5058 r90 bottom
R25 "33k" 0603 4038,5892 r180 top
R26 "10k" 0603 4146,5874 r90 top
R27 "470e" 0603 5754,4836 r180 top
R28 "3k3" 0603 5754,4890 r0 top
R29 "3k6" 0603 6420,4368 r180 top
R30 "2k2" 0603 6420,4326 r0 top
R31 "22k" 0603 6420,4284 r0 top
R32 "22k" 0603 6420,4188 r0 top
R33 "2k7" 0603 6420,4146 r0 top
R34 "1k2" 0603 6420,4104 r0 top
R35 "1k" 0603 6336,4722 r270 bottom
R36 "1k2" 0603 6378,4962 r270 bottom
R37 "1k" 0603 6336,4884 r270 bottom
R38 "1k" 0603 6978,4884 r270 bottom
R39 "1k" 0603 6936,4962 r270 bottom
R40 "390k" R-THT 6648,3804 r90 bottom
R41 "390k" R-THT 6750,4104 r270 bottom
R42 "12k" 0603 6894,3936 r270 bottom
R43 "100e" 0603 6876,4218 r180 top
R44 "100e" 0603 6876,4290 r180 top
R45 "100e" 0603 7086,4110 r270 top
R46 "100e" 0603 7158,4110 r270 top
R47 "100e" 0603 6876,4422 r180 top
R48 "100e" 0603 6876,4350 r180 top
R49 "100e" 0603 974,1529 r180 bottom
R50 "100e" 0603 974,1433 r180 bottom
R51 "1k" 0603 1136,1481 r90 bottom
R52 "100k" 0603 1136,1949 r90 bottom
R53 "100k" 0603 1136,1109 r90 bottom
R54 "100k" 0603 1136,689 r90 bottom
R55 "100k" 0603 1316,1433 r90 bottom
R56 "1k" 0603 1315,1905 r270 bottom
R57 "1k" 0603 1315,1060 r270 bottom
R58 "1k" 0603 1315,640 r270 bottom
R59 "100e" 0603 1480,1850 r180 top
R60 "1k" 0603 1480,1430 r180 top
R61 "100e" 0603 1480,1010 r180 top
R62 "100e" 0603 1480,590 r180 top
R63 "1k" 0603 3660,2574 r90 top
R64 "1k" 0603 1068,2304 r270 top
R65 "330e" 0603 3618,3024 r0 top
R66 "10e" 0603 3576,2616 r0 top
R67 "10e" 0603 3576,2532 r0 top
R68 "10e" 0603 1152,2256 r180 top
R69 "10e" 0603 1152,2352 r180 top
R70 "680e" 0603 3618,2970 r180 top
R71 "33k" 0603 4130,1735 r90 top
R72 "10k" 0603 4150,1635 r0 top
R73 "47e" 0603 1905,3295 r270 bottom
R74 "3k6" 0603 3936,720 r0 top
R75 "47e" 0603 1855,3295 r270 bottom
R76 "47e" 0603 1805,3295 r270 bottom
R77 "39k" 0603 3936,672 r180 top
R78 "47e" 0603 1755,3295 r270 bottom
R79 "47e" 0603 1705,3295 r270 bottom
R80 "47e" 0603 1655,3295 r270 bottom
R81 "47e" 0603 1605,3295 r270 bottom
R82 "47e" 0603 1555,3295 r270 bottom
R83 "10k" 0603 3312,756 r180 top
R84 "10k" 0603 3594,828 r270 top
R85 "10k" 0603 3642,828 r90 top
R86 "10k" 0603 3036,828 r90 top
R87 "10k" 0603 3720,480 r180 top
R88 "100e" 0603 3018,1326 r270 top
R89 "100e" 0603 3090,1326 r270 top
R90 "470e" 0603 5826,1464 r270 bottom
R91 "3k3" 0603 5682,1464 r90 bottom
R92 "3k3" 0603 5988,2730 r0 top
R93 "1k" 0603 5898,2418 r0 top
R94 "3k3" 0603 5988,2082 r0 top
R95 "1k" 0603 5898,1770 r0 top
R96 "100e" 0603 6120,2712 r90 top
R97 "100e" 0603 6078,2712 r90 top
R98 "100e" 0603 6036,2580 r270 top
R99 "100e" 0603 5994,2580 r270 top
R100 "100e" 0603 6078,2064 r90 top
R101 "100e" 0603 6120,2064 r90 top
R102 "100e" 0603 5994,1932 r270 top
R103 "100e" 0603 6036,1932 r270 top
R104 "100e" 0603 6120,2580 r90 top
R105 "100e" 0603 6162,2580 r90 top
R106 "100e" 0603 6162,1932 r90 top
R107 "100e" 0603 6120,1932 r90 top
R108 "1k" 0603 7542,3060 r0 top
R109 "1k" 0603 7812,816 r270 top
R110 "100e" 0603 7620,2922 r180 top
R111 "100e" 0603 7404,2682 r0 bottom
R112 "100e" 0603 7680,558 r90 top
R113 "100e" 0603 7440,774 r270 bottom
R114 "22k" 0603 7536,2778 r180 bottom
R115 "10k" 0603 7536,2730 r0 bottom
R116 "10k" 0603 7536,2682 r180 bottom
R117 "22k" 0603 7536,642 r90 bottom
R118 "10k" 0603 7488,642 r270 bottom
R119 "10k" 0603 7440,642 r90 bottom
R120 "1k" 0603 7410,2496 r270 top
R121 "1k" 0603 7254,768 r180 top
R122 "5k6" 0603 7458,2964 r90 top
R123 "5k6" 0603 7722,720 r0 top
R124 "5k6" 0603 7614,2496 r270 top
R125 "5k6" 0603 7254,564 r180 top
R126 "22k" 0603 7560,2496 r270 top
R127 "22k" 0603 7254,618 r180 top
R128 "1k" 0603 7716,1950 r90 bottom
R129 "1k" 0603 6684,588 r0 bottom
R130 "100k" 0603 7614,2352 r270 top
R131 "100k" 0603 7662,2106 r90 bottom
R132 "100k" 0603 7086,690 r180 top
R133 "100k" 0603 6840,642 r0 bottom
R134 "1k" 0603 7566,2352 r270 top
R135 "1k" 0603 7086,738 r180 top
R136 "22k" 0603 7782,2106 r270 bottom
R137 "22k" 0603 7734,2106 r90 bottom
R138 "22k" 0603 6840,522 r180 bottom
R139 "22k" 0603 6840,570 r0 bottom
R140 "100k" 0603 7716,2352 r90 top
R141 "100k" 0603 7086,588 r0 top
R142 "1k" 0603 7824,2028 r270 top
R143 "1k" 0603 7512,2106 r270 bottom
R144 "1k" 0603 6762,480 r180 top
R145 "1k" 0603 6840,792 r180 bottom
R146 "1k" 0603 7662,1710 r90 top
R147 "1k" 0603 7566,1710 r90 top
R148 "1k" 0603 6444,642 r0 top
R149 "1k" 0603 6444,738 r0 top
R150 "1k" 0603 5358,888 r180 top
R151 "1k" 0603 5226,888 r180 top
R152 "10k" 0603 5328,1098 r0 bottom
R153 "10k" 0603 5196,1098 r0 bottom
R154 "1k" 0603 5058,1080 r90 bottom
R155 "1k" 0603 5106,1080 r90 bottom
R156 "1k" 0603 5010,1080 r270 bottom
R157 "100k" 0603 7674,918 r180 top
R158 "100e" 0603 7674,960 r0 top
R159 "100e" 0603 7680,3072 r270 top
R160 "100e" 0603 7632,3072 r270 top
R161 "10k" 0603 7632,3072 r90 bottom
R162 "10k" 0603 7728,3072 r270 bottom
R163 "10k" 0603 8214,1086 r0 top
R164 "10k" 0603 8214,1038 r180 top
R165 "100e" 0603 8172,894 r270 top
R166 "100e" 0603 8268,894 r90 top
R167 "100e" 0603 8226,2982 r0 top
R168 "100e" 0603 8226,3030 r0 top
R169 "1k" 0603 5112.8,6676.38 r0 bottom
R170 "100e" 0603 5112.8,6556.3 r0 bottom
R171 "100e" 0603 5112.8,6616.34 r0 bottom
R172 "10k" 0603 5280.91,6616.34 r0 bottom
R173 "10k" 0603 5280.91,6556.3 r180 bottom
R174 "2k2" 0603 5280.91,6676.38 r0 bottom
R175 "1e" 0805 5280.91,6424.21 r0 bottom
R176 "10k" 0603 5388.98,6472.24 r90 bottom
R177 "100e" 0603 6156.54,6510.87 r180 bottom
R178 "10k" 0603 6114.65,6594.65 r90 bottom
R179 "10k" 0603 6114.65,6427.09 r90 bottom
R180 "1k" 0603 5683.13,6802.98 r270 bottom
R181 "1k" 0603 5683.13,6670.89 r90 bottom
R182 "1k" 0603 5899.28,6802.98 r270 bottom
R183 "1k" 0603 5851.24,6802.98 r270 bottom
R184 "1k" 0603 5899.28,6670.89 r90 bottom
R185 "1k" 0603 5851.24,6670.89 r90 bottom
R186 "3k3" 0603 5743.17,6754.94 r90 bottom
R187 "3k3" 0603 5949.7,6732 r90 bottom
R188 "1k" 0603 5995.13,6802.98 r270 bottom
R189 "1k" 0603 5995.13,6670.89 r90 bottom
R190 "1k" 0603 6211.28,6802.98 r270 bottom
R191 "1k" 0603 6163.24,6802.98 r270 bottom
R192 "1k" 0603 6211.28,6670.89 r90 bottom
R193 "1k" 0603 6163.24,6670.89 r90 bottom
R194 "3k3" 0603 6055.17,6754.94 r90 bottom
R195 "3k3" 0603 6261.7,6732 r90 bottom
R196 "100e" 0603 5647.87,6504.88 r180 bottom
R197 "100e" 0603 5647.87,6457.01 r180 bottom
R198 "330e" 0603 2970,3060 r270 top
R199 "680e" 0603 2922,3060 r90 top
S1 "RELAY-32" RELAY-32 1891.61,6034.68 r90 top
S2 "RELAY-32" RELAY-32 1468.36,6034.68 r90 top
S3 "RELAY-32" RELAY-32 1045.12,6034.68 r90 top
S4 "RELAY-32" RELAY-32 1801.32,3973.12 r180 top
U1 "TLE2084" SOIC-16 3690,5418 r270 top
U2 "TPS62110" QFN-16 4071.07,5752.46 r270 top
U3 "ADS1201" SOIC-16 3690,4812 r270 top
U4 "LTSR-15NP" LTSR 5424,5598 r90 top
U5 "LTSR-15NP" LTSR 7464,5598 r90 top
U6 "UCC284-5" SOIC-8 5532,4116 r0 bottom
U7 "TLV1117-A" SOT-223 5706,4752 r180 top
U8 "TLV1117-5" SOT-223 5031.17,4976.54 r270 top
U9 "LT1940" LT1940 6204,4236 r0 top
U10 "TLE2084" SOIC-16 6450,4674 r0 bottom
U11 "THS4151" MSOP-8 7218,3936 r180 top
U12 "ADR391" TSOT-5 7068,4494 r90 bottom
U13 "ADS1278" HTQFP-64 7260,4476 r90 top
U14 "SN65LVDS047" TSSOP-16 7740,4476 r0 top
U15 "6N135" DIP-8 1076,1631 r0 top
U16 "6N135" DIP-8 1376,1751 r180 top
U17 "6N135" DIP-8 1376,911 r180 top
U18 "6N135" DIP-8 1376,491 r180 top
U19 "SN74LV02" TSSOP-14 3190,3060 r0 top
U20 "TPS62110" QFN-16 4003.24,1706.18 r180 top
U21 "TLE2084" SOIC-16 3525,820 r180 top
U22 "SN65LVDS048" TSSOP-16 1720,2860 r270 top
U23 "ADS1201" SOIC-16 2826,1482 r90 top
U24 "TPS77918" MSOP-8 6104.77,2895.91 r180 top
U25 "TLV1117-A" SOT-223 5730,1488 r180 top
U26 "AD9859" SV-48 5712,2592 r90 top
U27 "AD9859" SV-48 5712,1944 r90 top
U28 "MC1496" SOIC-14 7362,2610 r90 top
U29 "MC1496" SOIC-14 7368,816 r0 top
U30 "TLE2084" SOIC-16 7764,2238 r270 top
U31 "TLE2084" SOIC-16 6972,540 r180 top
U32 "LM339" SOIC-14 5076,960 r90 top
U33 "AD8075" TSSOP-16 7872,3072 r0 top
U34 "AD8075" TSSOP-16 7992,894 r180 top
U35 "AD8062" MSOP-8 5232.87,6676.38 r270 top
U36 "AD8062" MSOP-8 5695.14,6766.95 r0 top
U37 "AD8075" TSSOP-16 5943.7,6492 r180 top
U38 "AD8062" MSOP-8 6007.14,6766.95 r0 top
X1 "F338-25" F338 7422,4482 r90 bottom
X2 "F338-20" F338 5736,2268 r0 top

## Footprints (in the part's own frame and the unit in brackets; to place one, negate y for a bottom-side part, rotate by r counter-clockwise, add the part's x,y. Pads: shape width x height; smd on the part's side, far side on the other; paste and mask are expansions set on the pad)
6.2UH [mm]
  rect 4x7 smd: 1(-3.5,0) 2(3.5,0)
  silkscreen extent -3.5,-3.5 3.5,3.5
0603 [mm]
  rect 1x0.762 smd: 1(-1,0) 2(1,0)
0805 [mil]
  rect 50x50 smd: 1(-40,0) 2(40,0)
1206 [mil]
  rect 50x60 smd: 1(-60,0) 2(60,0)
C-35MM [mm]
  round 3 hole 2: 1(0,0) 2(10.16,0)
  silkscreen extent -12.42,-17.5 22.58,17.5
C-SMT [mm]
  rect 3.5x0.8 smd: 1(-2.9,0) 2(2.9,0)
  silkscreen extent -3.25,-3.25 3.25,3.25
D-THT [mil]
  rect 50x50 smd: 1(0,0) 2(300,0)
  silkscreen extent 220,-20 250,20
DIP-8 [mm]
  round 1.8 hole 0.8: 1(0,0) 2(0,-2.54) 3(0,-5.08) 4(0,-7.62) 5(7.62,-7.62) 6(7.62,-5.08) 7(7.62,-2.54) 8(7.62,0)
  silkscreen extent 0.31,-8.81 7.31,1.19
DO-201 [mm]
  round 2.4 hole 1.4: 1(0,0) 2(12.7,0)
  silkscreen extent 1.35,-2.54 11.35,2.54
F338 [mm]
  rrect50% 1.5x1.4 smd: 1(-1.25,-0.95)
  rect 1.5x1.4 smd: 2(1.25,-0.95) 3(1.25,0.95) 4(-1.25,0.95)
  silkscreen extent -1.5,-1.15 1.5,1.15
HEADER-26 [mm]
  round 2 hole 1: 1(0,0) 2(2.54,0) 3(0,-2.54) 4(2.54,-2.54) 5(0,-5.08) 6(2.54,-5.08) 7(0,-7.62) 8(2.54,-7.62) 9(0,-10.16) 10(2.54,-10.16) 11(0,-12.7) 12(2.54,-12.7) 13(0,-15.24) 14(2.54,-15.24) 15(0,-17.78) 16(2.54,-17.78) 17(0,-20.32) 18(2.54,-20.32) 19(0,-22.86) 20(2.54,-22.86) 21(0,-25.4) 22(2.54,-25.4) 23(0,-27.94) 24(2.54,-27.94) 25(0,-30.48) 26(2.54,-30.48)
  silkscreen extent -3.18,-35.56 5.72,5.08
HFBR [mm]
  rect 5.08x0.635 smd: 1(0,0) 2(0,-2.54) 3(0,-5.08) 4(0,-7.62)
  round 1.8 hole 0.8: 5(10.16,-7.62) 6(10.16,0)
  silkscreen extent 0,-8.89 18.86,3.27
HTQFP-64 [mm]
  rect 1x0.27 smd: 1(-6,3.75) 2(-6,3.25) 3(-6,2.75) 4(-6,2.25) 5(-6,1.75) 6(-6,1.25) 7(-6,0.75) 8(-6,0.25) 9(-6,-0.25) 10(-6,-0.75) 11(-6,-1.25) 12(-6,-1.75) 13(-6,-2.25) 14(-6,-2.75) 15(-6,-3.25) 16(-6,-3.75) 33(6,-3.75) 34(6,-3.25) 35(6,-2.75) 36(6,-2.25) 37(6,-1.75) 38(6,-1.25) 39(6,-0.75) 40(6,-0.25) 41(6,0.25) 42(6,0.75) 43(6,1.25) 44(6,1.75) 45(6,2.25) 46(6,2.75) 47(6,3.25) 48(6,3.75)
  rect 0.27x1 smd: 17(-3.75,-6) 18(-3.25,-6) 19(-2.75,-6) 20(-2.25,-6) 21(-1.75,-6) 22(-1.25,-6) 23(-0.75,-6) 24(-0.25,-6) 25(0.25,-6) 26(0.75,-6) 27(1.25,-6) 28(1.75,-6) 29(2.25,-6) 30(2.75,-6) 31(3.25,-6) 32(3.75,-6) 49(3.75,6) 50(3.25,6) 51(2.75,6) 52(2.25,6) 53(1.75,6) 54(1.25,6) 55(0.75,6) 56(0.25,6) 57(-0.25,6) 58(-0.75,6) 59(-1.25,6) 60(-1.75,6) 61(-2.25,6) 62(-2.75,6) 63(-3.25,6) 64(-3.75,6)
  rect 8x8 smd: 65(0,0)
  silkscreen extent -5,-5 5,5
LT1940 [mm]
  rect 1x0.3 smd: 1(-3.2,2.275) 2(-3.2,1.625) 3(-3.2,0.975) 4(-3.2,0.325) 5(-3.2,-0.325) 6(-3.2,-0.975) 7(-3.2,-1.625) 8(-3.2,-2.275) 9(3.2,-2.275) 10(3.2,-1.625) 11(3.2,-0.975) 12(3.2,-0.325) 13(3.2,0.325) 14(3.2,0.975) 15(3.2,1.625) 16(3.2,2.275)
  rect 2.74x2.74 hole 2: 17(0,0)
  silkscreen extent -2.25,-2.5 2.25,2.5
LTSR [mm]
  round 2.2 hole 1.4: 1(0,0) 2(2.54,0) 3(5.08,0) 4(5.08,-12.7) 5(2.54,-12.7) 6(0,-12.7)
  rect 4.5x0.5 smd: 7(-9.87,-9.21) 8(-9.87,-7.303) 9(-9.87,-5.397) 10(-9.87,-3.49)
  silkscreen extent -9.46,-11 12.74,-1.7
MOUNT [mm]
  round 7 hole 3.5: 1(0,0)
MSOP-8 [mm]
  rect 1.4x0.38 smd: 1(0,0) 2(0,-0.65) 3(0,-1.3) 4(0,-1.95) 5(4.875,-1.95) 6(4.875,-1.3) 7(4.875,-0.65) 8(4.875,0)
  silkscreen extent 0.94,-2.47 3.94,0.53
QFN-16 [mm]
  rect 0.8x0.38 smd: 1(2,-0.975) 2(2,-0.325) 3(2,0.325) 4(2,0.975) 9(-2,0.975) 10(-2,0.325) 11(-2,-0.325) 12(-2,-0.975)
  rect 0.38x0.8 smd: 5(0.975,2) 6(0.325,2) 7(-0.325,2) 8(-0.975,2) 13(-0.975,-2) 14(-0.325,-2) 15(0.325,-2) 16(0.975,-2)
  rect 2.7x2.7 smd: 17(0,0)
  silkscreen extent -2,-2 2,2
R-5W [mm]
  round 2 hole 1: 1(-10.16,0) 2(10.16,0)
R-THT [mil]
  rect 50x50 smd: 1(0,0) 2(300,0)
RELAY-32 [mm]
  round 2 hole 1: 1(-8.89,3.81) 2(-8.89,-3.81) 3(8.89,-3.81) 4(8.89,3.81) 5(1.27,3.81)
  silkscreen extent -10.29,-5.21 10.29,5.21
"RJ-45 CAT-5" [mm]
  round 2 hole 1: 1(0,0) 2(1.27,2.54) 3(2.54,0) 4(3.81,2.54) 5(5.08,0) 6(6.35,2.54) 7(7.62,0) 8(8.89,2.54)
  round 2.6 hole 1.6: 9(-3.39,-3.302) 10(12.28,-3.302)
  round 3.25 hole 3.25: 11(-1.27,-6.35) 12(10.16,-6.35)
  silkscreen extent -3.45,-9.07 12.34,3.99
SMA [mm]
  rect 4x1.27 smd: 1(0,0)
  rect 4x7 smd far side: 2(0,0)
  silkscreen extent -11.5,-3.5 -2,3.5
SOIC-8 [mm]
  rect 2x0.5 smd: 1(0,0) 2(0,-1.27) 3(0,-2.54) 4(0,-3.81) 5(6,-3.81) 6(6,-2.54) 7(6,-1.27) 8(6,0)
  silkscreen extent 1,-4.3 5,0.49
SOIC-14 [mm]
  rect 2x0.5 smd: 1(0,0) 2(0,-1.27) 3(0,-2.54) 4(0,-3.81) 5(0,-5.08) 6(0,-6.35) 7(0,-7.62) 8(6,-7.62) 9(6,-6.35) 10(6,-5.08) 11(6,-3.81) 12(6,-2.54) 13(6,-1.27) 14(6,0)
  silkscreen extent 1,-8.11 5,0.49
SOIC-16 [mm]
  rect 2x0.5 smd: 1(0,0) 2(0,-1.27) 3(0,-2.54) 4(0,-3.81) 5(0,-5.08) 6(0,-6.35) 7(0,-7.62) 8(0,-8.89) 9(10.5,-8.89) 10(10.5,-7.62) 11(10.5,-6.35) 12(10.5,-5.08) 13(10.5,-3.81) 14(10.5,-2.54) 15(10.5,-1.27) 16(10.5,0)
  silkscreen extent 1.45,-9.64 9.05,0.75
SOT-23 [mm]
  rect 1x0.41 smd: 1(-1.155,0.952) 2(-1.155,-0.953) 3(1.156,0)
  silkscreen extent -0.65,-1.46 0.65,1.46
SOT-223 [mm]
  rect 1x3 smd: 1(-2.3,0) 2(0,0) 3(2.3,0)
  rect 7x7 smd: 4(0,7.3)
  silkscreen extent -3.35,1.8 3.35,5.5
SV-48 [mm]
  rect 1x0.27 smd: 1(-4.5,2.75) 2(-4.5,2.25) 3(-4.5,1.75) 4(-4.5,1.25) 5(-4.5,0.75) 6(-4.5,0.25) 7(-4.5,-0.25) 8(-4.5,-0.75) 9(-4.5,-1.25) 10(-4.5,-1.75) 11(-4.5,-2.25) 12(-4.5,-2.75) 25(4.5,-2.75) 26(4.5,-2.25) 27(4.5,-1.75) 28(4.5,-1.25) 29(4.5,-0.75) 30(4.5,-0.25) 31(4.5,0.25) 32(4.5,0.75) 33(4.5,1.25) 34(4.5,1.75) 35(4.5,2.25) 36(4.5,2.75)
  rect 0.27x1 smd: 13(-2.75,-4.5) 14(-2.25,-4.5) 15(-1.75,-4.5) 16(-1.25,-4.5) 17(-0.75,-4.5) 18(-0.25,-4.5) 19(0.25,-4.5) 20(0.75,-4.5) 21(1.25,-4.5) 22(1.75,-4.5) 23(2.25,-4.5) 24(2.75,-4.5) 37(2.75,4.5) 38(2.25,4.5) 39(1.75,4.5) 40(1.25,4.5) 41(0.75,4.5) 42(0.25,4.5) 43(-0.25,4.5) 44(-0.75,4.5) 45(-1.25,4.5) 46(-1.75,4.5) 47(-2.25,4.5) 48(-2.75,4.5)
  rect 2x2 hole 1.5: 49(0,0)
  silkscreen extent -3.5,-3.5 3.5,3.5
TERM-2_TERM-2(Primary) [mm]
  round 2.4 hole 1.4: 1(5.08,0) 2(0,0)
  silkscreen extent -2.5,-5.25 7.5,3.75
TERM-3_TERM-3(Primary) [mm]
  round 2.4 hole 1.4: 1(10.16,0) 2(5.08,0) 3(0,0)
  silkscreen extent -2.5,-5.25 12.58,3.75
TERMINAL_TERMINAL(Primary) [mm]
  round 2.4 hole 1.4: 1(0,0) 2(10.16,0)
  silkscreen extent -2.5,-5.25 12.58,3.75
TO-220-2-UP [mm]
  round 2 hole 1: 1(0,0) 2(-5.08,0)
  silkscreen extent -7.62,-2.5 2.54,1.5
TSOT-5 [mm]
  rect 1x0.5 smd: 1(-1.4,0.95) 2(-1.4,0) 3(-1.4,-0.95) 4(1.4,-0.95) 5(1.4,0.95)
  silkscreen extent -0.8,-1.45 0.8,1.45
TSSOP-14 [mm]
  rect 1x0.3 smd: 1(-3.25,1.95) 2(-3.25,1.3) 3(-3.25,0.65) 4(-3.25,0) 5(-3.25,-0.65) 6(-3.25,-1.3) 7(-3.25,-1.95) 8(3.25,-1.95) 9(3.25,-1.3) 10(3.25,-0.65) 11(3.25,0) 12(3.25,0.65) 13(3.25,1.3) 14(3.25,1.95)
  silkscreen extent -2.25,-2.22 2.25,2.22
TSSOP-16 [mm]
  rect 1x0.3 smd: 1(-3.25,2.275) 2(-3.25,1.625) 3(-3.25,0.975) 4(-3.25,0.325) 5(-3.25,-0.325) 6(-3.25,-0.975) 7(-3.25,-1.625) 8(-3.25,-2.275) 9(3.25,-2.275) 10(3.25,-1.625) 11(3.25,-0.975) 12(3.25,-0.325) 13(3.25,0.325) 14(3.25,0.975) 15(3.25,1.625) 16(3.25,2.275)
  silkscreen extent -2.25,-2.55 2.25,2.55

## Via types
v1: diameter 27.56, hole 11.81, Top Layer, Top to Bottom Layer, Bottom, 373 vias
v2: diameter 98.43, hole 78.74, Top Layer, Top to Bottom Layer, Bottom, 2 vias
v3: diameter 157.48, hole 137.8, Top Layer, Top to Bottom Layer, Bottom, 1 vias

## Nets (pads, with @x,y where several pads share a name; then routed paths per layer and width w, separated by ;. In a path a pad name is that pad's centre, name@x,y a point inside that pad or via, vN(x,y) a via of type N, cw(c..) or ccw(c..) an arc to the next point about the centre after c; other vN are vias at no path point)
1_5V: C12.2 C13.2 C14.1 J3.1 J3.3 J3.5 J3.7 L1.2 R25.2 U3.1 U3.11 U3.13 U3.16 | length 824.9
  Top Layer, Top w7.87: U3.11@3440,4398.61 3440,4460 v1(3444,4464) ; U3.13@3540,4398.61 v1(3540,4464) ; L1.2@3684,5994 3696,5994 3744,5994 3792,5994 L1.2@3809.84,5994 ; U3.16@3690,4398.61 v1(3690,4464) ; v1(3690,4746) U3.1@3690,4812 ; v1(3810,5988) L1.2@3815.17,5988.68 ; L1.2@3942,5994 3936,5994 3888,5994 3840,5994 L1.2@3809.84,5994 ; R25.2@3998.63,5892 3932.63,5958 3912,5958 L1.2@3815.17,5988.68 ; L1.2@3809.84,5994 L1.2@3815.17,5988.68
  Bottom Layer, Bottom w7.87: C12.2@3428.63,4512 3428.63,4479.37 v1(3444,4464) ; C13.2@3690,4743.37 v1(3690,4746) ; C14.1@3810,5970.17 v1(3810,5988)
1_12V: C4.2 C7.2 C8.2 D7.2 D8.2 D9.2 D10.2 J10.3 S1.1 S2.1 S3.1 S4.1 U1.4 U2.2 U2.3 U2.4 U2.8 | length 7741.7
  Top Layer, Top w7.87: U2.2@4058.28,5673.72 4058.28,5655.72 C7.2@4080,5634 ; C7.2@4080,5628 C7.2@4083,5631 ; C7.2@4083.37,5634 C7.2@4080,5634 ; U2.3@4083.87,5673.72 C7.2@4083.87,5637.87 ; C7.2@4086,5628 C7.2@4083.87,5630.13 ; 4115.83,5586 4122,5586 4083.87,5624.13 C7.2@4083.87,5630.13 ; U2.8@4149.81,5790.84 4169.16,5790.84 4182,5778 4182,5742 ; C8.2@4212,5739.37 4209.37,5742 4182,5742 ; C7.2@4080,5634 C7.2@4083.87,5637.87 ; C7.2@4080,5634 C7.2@4083,5631 ; C7.2@4083,5631 C7.2@4083.87,5630.13 ; C7.2@4083,5631 C7.2@4083.87,5631.87 ; C7.2@4083.87,5630.13 C7.2@4083.87,5631.87 ; C7.2@4083.87,5631.87 4109.46,5657.46 U2.4@4109.46,5673.72 4155.72,5673.72 4182,5700 4182,5742 ; C7.2@4083.87,5631.87 C7.2@4083.87,5637.87
  Top Layer, Top w9.84: S3.1@895.12,5684.68 895.12,5640.31 949.43,5586 1382.5,5586 ; S2.1@1318.36,5684.68 1318.36,5650.14 1382.5,5586 ; S1.1@1741.61,5684.68 v1(1741.61,5659.97) 1815.57,5586 ; S4.1@2151.32,3823.12 2173.12,3823.12 2460,4110 2460,5100 2946,5586 ; U1.4@3540,5418 v1(3540,5514) 3612,5586 ; J10.3@4489.15,5586 4152,5586 4122,5586 4115.83,5586 4092,5586 3612,5586 ; 1382.5,5586 1815.57,5586 ; 1815.57,5586 2946,5586 ; 2946,5586 3612,5586
  Bottom Layer, Bottom w7.87: v1(3540,5514) 3791.83,5514 C4.2@3917.83,5388
  Bottom Layer, Bottom w19.68: D9.2@882.91,5837.83 891.57,5826.02 891.57,5688.22 S3.1@895.12,5684.68 ; D8.2@1306.16,5837.83 1310.88,5826.02 1310.88,5692.16 S2.1@1318.36,5684.68 ; D7.2@1729.4,5837.83 1730.19,5826.02 1730.19,5696.09 S1.1@1741.61,5684.68 ; D10.2@1998.17,3810.91 2009.98,3819.57 2147.78,3819.57 S4.1@2151.32,3823.12
1_565V: C1.1 J5.1 R4.2 R8.1 R9.1 R10.1 R11.1 R12.1 R13.1 R14.1 R15.1 R16.2 S4.4 | length 260.4
  Bottom Layer, Bottom w9.84: C1.1@2316,4704 2328,4704 2376,4752 R4.2@2466,4752 2471.1,4757.1 R16.2@2554.43,4757.1
1_-12V: C5.1 J10.1 U1.13 | length 1341.2
  Top Layer, Top w7.87: 3715.83,5186 C5.1@3917.83,5388
  Top Layer, Top w9.84: U1.13@3540,5004.61 3540,5058 3668,5186 3715.83,5186 4119.83,5186 J10.1@4489.15,5186
1_A: D1.1 D2.2 J4.2 S1.5 | length 4041.1
  Mid-Layer 2, VCC w19.68: D1.1@1470,5238 1470,5268 D2.2@1472,5448
  Mid-Layer 2, VCC w39.37: S1.5@1741.61,6084.68 1866.93,6210 4326,6210 4488,6048 J4.2@4489.15,6044 J4.2@4488,6042
  Mid-Layer 2, VCC w98.43: D1.1@1470,5238 1470,5268 1470,5813.07 S1.5@1741.61,6084.68
1_A1: J2.2 S1.4 | length 355.8
  Mid-Layer 2, VCC w98.43: S1.4@1741.61,6384.68 1936,6579.07 J2.2@1936,6660
1_B: D3.1 D4.2 S2.5 | length 811.3
  Top Layer, Top w98.43: D4.2@724.47,5839.18 v1(724.47,5848.47)
  Mid-Layer 2, VCC w98.43: D3.1@724.47,5728.94 D4.2@724.47,5839.18 ; v1(724.47,5848.47) v1(768,5892) 1125.68,5892 S2.5@1318.36,6084.68
1_B1: J2.1 S2.4 | length 365.5
  Mid-Layer 2, VCC w98.43: S2.4@1318.36,6384.68 1536,6602.31 J2.1@1536,6660
1_C: D5.1 D6.2 S3.5 | length 686.7
  Mid-Layer 2, VCC w98.43: D5.1@512.46,5728.94 D6.2@512.46,5839.18 512.46,5996.46 600.68,6084.68 S3.5@895.12,6084.68
1_C1: J1.2 S3.4 | length 458.9
  Mid-Layer 2, VCC w98.43: S3.4@895.12,6384.68 1170.44,6660 J1.2@1240,6660
1_GND: C2.2 C4.1 C5.2 C6.2 C7.1 C8.1 C10.2 C12.1 C13.1 C14.2 D2.1 D4.1 D6.1 D22.1 J3.9 J3.10 J5.2 J10.2 Q1.2 Q2.2 Q3.2 Q4.2 Q5.2 R1.1 R2.1 R3.1 R5.1 R6.1 R7.1 R19.1 R26.1 U2.1 U2.5 U2.6 U2.7 U2.9 U2.11 U2.12 U2.13 U2.16 U2.17 U3.7 U3.9 U3.10 U3.12 | length 2258.9
  Top Layer, Top w7.87: U3.9@3340,4398.61 3340,4444 v1(3360,4464) 3390,4434 U3.10@3390,4398.61 ; v1(3390,4746) U3.7@3390,4812 ; U3.12@3490,4398.61 3490,4462 v1(3492,4464) ; R1.1@3894,4389.37 v1(3894,4392) 3897.47,4395.47 Q1.2@3964.5,4395.47 ; U2.16@3992.33,5714.07 U2.17@4032.68,5714.07 ; U2.13@3992.33,5790.84 U2.17@4032.68,5790.84 ; C7.1@4004.63,5634 4008,5634 4032.68,5658.69 U2.1@4032.69,5673.72 U2.17@4032.68,5714.07 ; U2.12@4032.69,5831.2 U2.17@4032.68,5790.84 ; U2.11@4058.28,5831.2 U2.17@4058.28,5765.25 ; v1(4146,5388) C5.2@4146.17,5388 ; R26.1@4146,5834.63 4146,5832 4145.2,5831.2 U2.9@4109.46,5831.2 4109.46,5790.84 U2.17@4083.87,5765.25 ; U2.5@4149.81,5714.07 4109.46,5714.07 U2.17@4083.87,5739.66 ; U2.6@4149.81,5739.66 U2.17@4083.87,5739.66 ; U2.7@4149.81,5765.25 U2.17@4083.87,5765.25 ; v1(4212,5658) C8.1@4212,5660.63 ; U2.17@4032.68,5714.07 v2(4071.07,5752.46) ; U2.17@4032.68,5790.84 U2.17@4058.28,5765.25 ; U2.17@4058.28,5765.25 v2(4071.07,5752.46) ; v2(4071.07,5752.46) U2.17@4083.87,5765.25 ; v2(4071.07,5752.46) U2.17@4083.87,5739.66
  Mid-Layer 1, GND w7.87: 3492,4380 v1(3492,4464) 3492,4530
  Bottom Layer, Bottom w7.87: R19.1@3054,5325.37 3056.63,5328 v1(3102,5328) 3141.37,5328 C6.2@3144,5325.37 3150,5334 3234,5418 D22.1@3234,5550 ; v1(3390,4746) 3408,4728 C10.2@3482.63,4728 ; v1(3492,4464) 3507.37,4479.37 C12.1@3507.37,4512 ; C13.1@3690,4664.63 v1(3690,4668) ; C14.2@3810,5741.83 v1(3810,5832) ; v1(4146,5388) C4.1@4146.17,5388
  Bottom Layer, Bottom w9.84: Q4.2@1007.62,5674.24 1007.62,5634.38 1014,5628 R3.1@1010.63,5628 v1(1008,5628) ; v1(1386,5628) R2.1@1430.63,5628 1434,5628 1430.86,5631.14 Q3.2@1430.86,5674.24 ; v1(1848,5628) R6.1@1850.63,5628 1854,5628 1854.11,5628.11 Q2.2@1854.11,5674.24 ; Q5.2@2161.76,3935.62 2207.62,3935.62 v1(2208,3936) R7.1@2208,3938.63 ; C2.2@2808,6418 2814,6402 2832,6384 R5.1@2934,6384
1_MAINS: J3.8 Q2.1 Q3.1 Q4.1 R2.2 R3.2 R6.2 | length 4450.9
  Bottom Layer, Bottom w9.84: Q4.1@1082.62,5674.24 1082.62,5637.38 1092,5628 R3.2@1089.37,5628 1131.37,5586 1551.37,5586 ; Q3.1@1505.86,5674.24 1505.86,5628.14 1506,5628 R2.2@1509.37,5628 1551.37,5586 ; Q2.1@1929.11,5674.24 1929.11,5631.11 1926,5628 R6.2@1929.37,5628 1929.37,5498.63 ; J3.8@4197.15,4204 4135.15,4266 2460,4266 1929.37,4796.63 1929.37,5498.63 ; 1551.37,5586 1842,5586 1929.37,5498.63
1_MCLK: J3.2 R1.2 U3.14 | length 476.5
  Top Layer, Top w7.87: U3.14@3590,4398.61 3590,4354 3630,4314 3894,4314 R1.2@3894,4310.63 3894,4308 3897.15,4304.85 J3.2@3897.15,4204
1_MOUT: Q1.1 U3.15 | length 535.1
  Top Layer, Top w7.87: U3.15@3640,4398.61 3640,4462 3672,4494 3972,4494 4039.5,4426.5 Q1.1@4039.5,4395.47
1_N: J1.1 J4.1 | length 3887.7
  Mid-Layer 2, VCC w39.37: J1.1@840,6660 1020,6840 3690,6840 4086,6444 J4.1@4489.15,6444
1_RECTIFIED: D1.2 D3.2 D5.2 R8.2 R9.2 R10.2 R11.2 R12.2 R13.2 R14.2 R15.2 S4.5
1_SOFTSTART: J3.6 Q5.1 R7.2 | length 2099.8
  Bottom Layer, Bottom w6: R7.2@2208,4017.37 2240.63,4050 4074,4050 4097.15,4073.15 J3.6@4097.15,4204
  Bottom Layer, Bottom w9.84: Q5.1@2161.76,4010.62 2205.38,4010.62 2208,4008 R7.2@2208,4017.37
2_1.8V: C37.1 C50.2 L3.2 R34.2 U13.26 | length 1828.5
  Top Layer, Top w7.87: U13.26@7496.22,4505.53 7529.53,4505.53 v1(7536,4512)
  Top Layer, Top w9.84: v1(6456,4104) R34.2@6459.37,4104
  Mid-Layer 2, VCC w9.84: v1(6456,4104) 7338,4104 7410,4104 v1(7536,4230)
  Bottom Layer, Bottom w7.87: v1(7536,4230) v1(7536,4512) C50.2@7536,4514.63
  Bottom Layer, Bottom w9.84: L3.2@6275.8,3978 L3.2@6335.8,4038 ; v1(6456,4014) 6354,4014 6336,4032 L3.2@6335.8,4038 ; v1(6456,4104) 6390,4038 L3.2@6335.8,4038
2_2.5VREF: C40.2 C47.2 U11.2 U12.3 U12.4 U13.56 | length 787.6
  Top Layer, Top w7.87: U13.56@7023.78,4485.84 7059.84,4485.84 v1(7068,4494) ; v1(7170,3966) 7174.41,3961.59 U11.2@7218,3961.59
  Bottom Layer, Bottom w7.87: U12.4@7030.6,4549.12 7030.6,4531.4 v1(7068,4494) 7056,4494 7030.6,4468.6 U12.3@7030.6,4438.88 7030.6,4363.4 7032,4362 C47.2@7028.63,4362 7028.63,4107.37 C40.2@7166.63,3969.37 ; C40.2@7164,3975.37 C40.2@7166.63,3969.37 ; v1(7170,3966) C40.2@7166.63,3969.37